# Altium PCB motordriver-v6.3.1.PcbDoc (part 1 of 2)
Units mm, origin at the board's own origin, x right, y up, seen from the top; angles counter-clockwise.
Board outline 43 x 47 mm, 4 copper layers (TOP, GND, POWER, BOT), stack 0.603 mm thick; 165 components, 77 nets, 427 pads, 347 vias.
Unrouted connection lines stored in the file: 27.
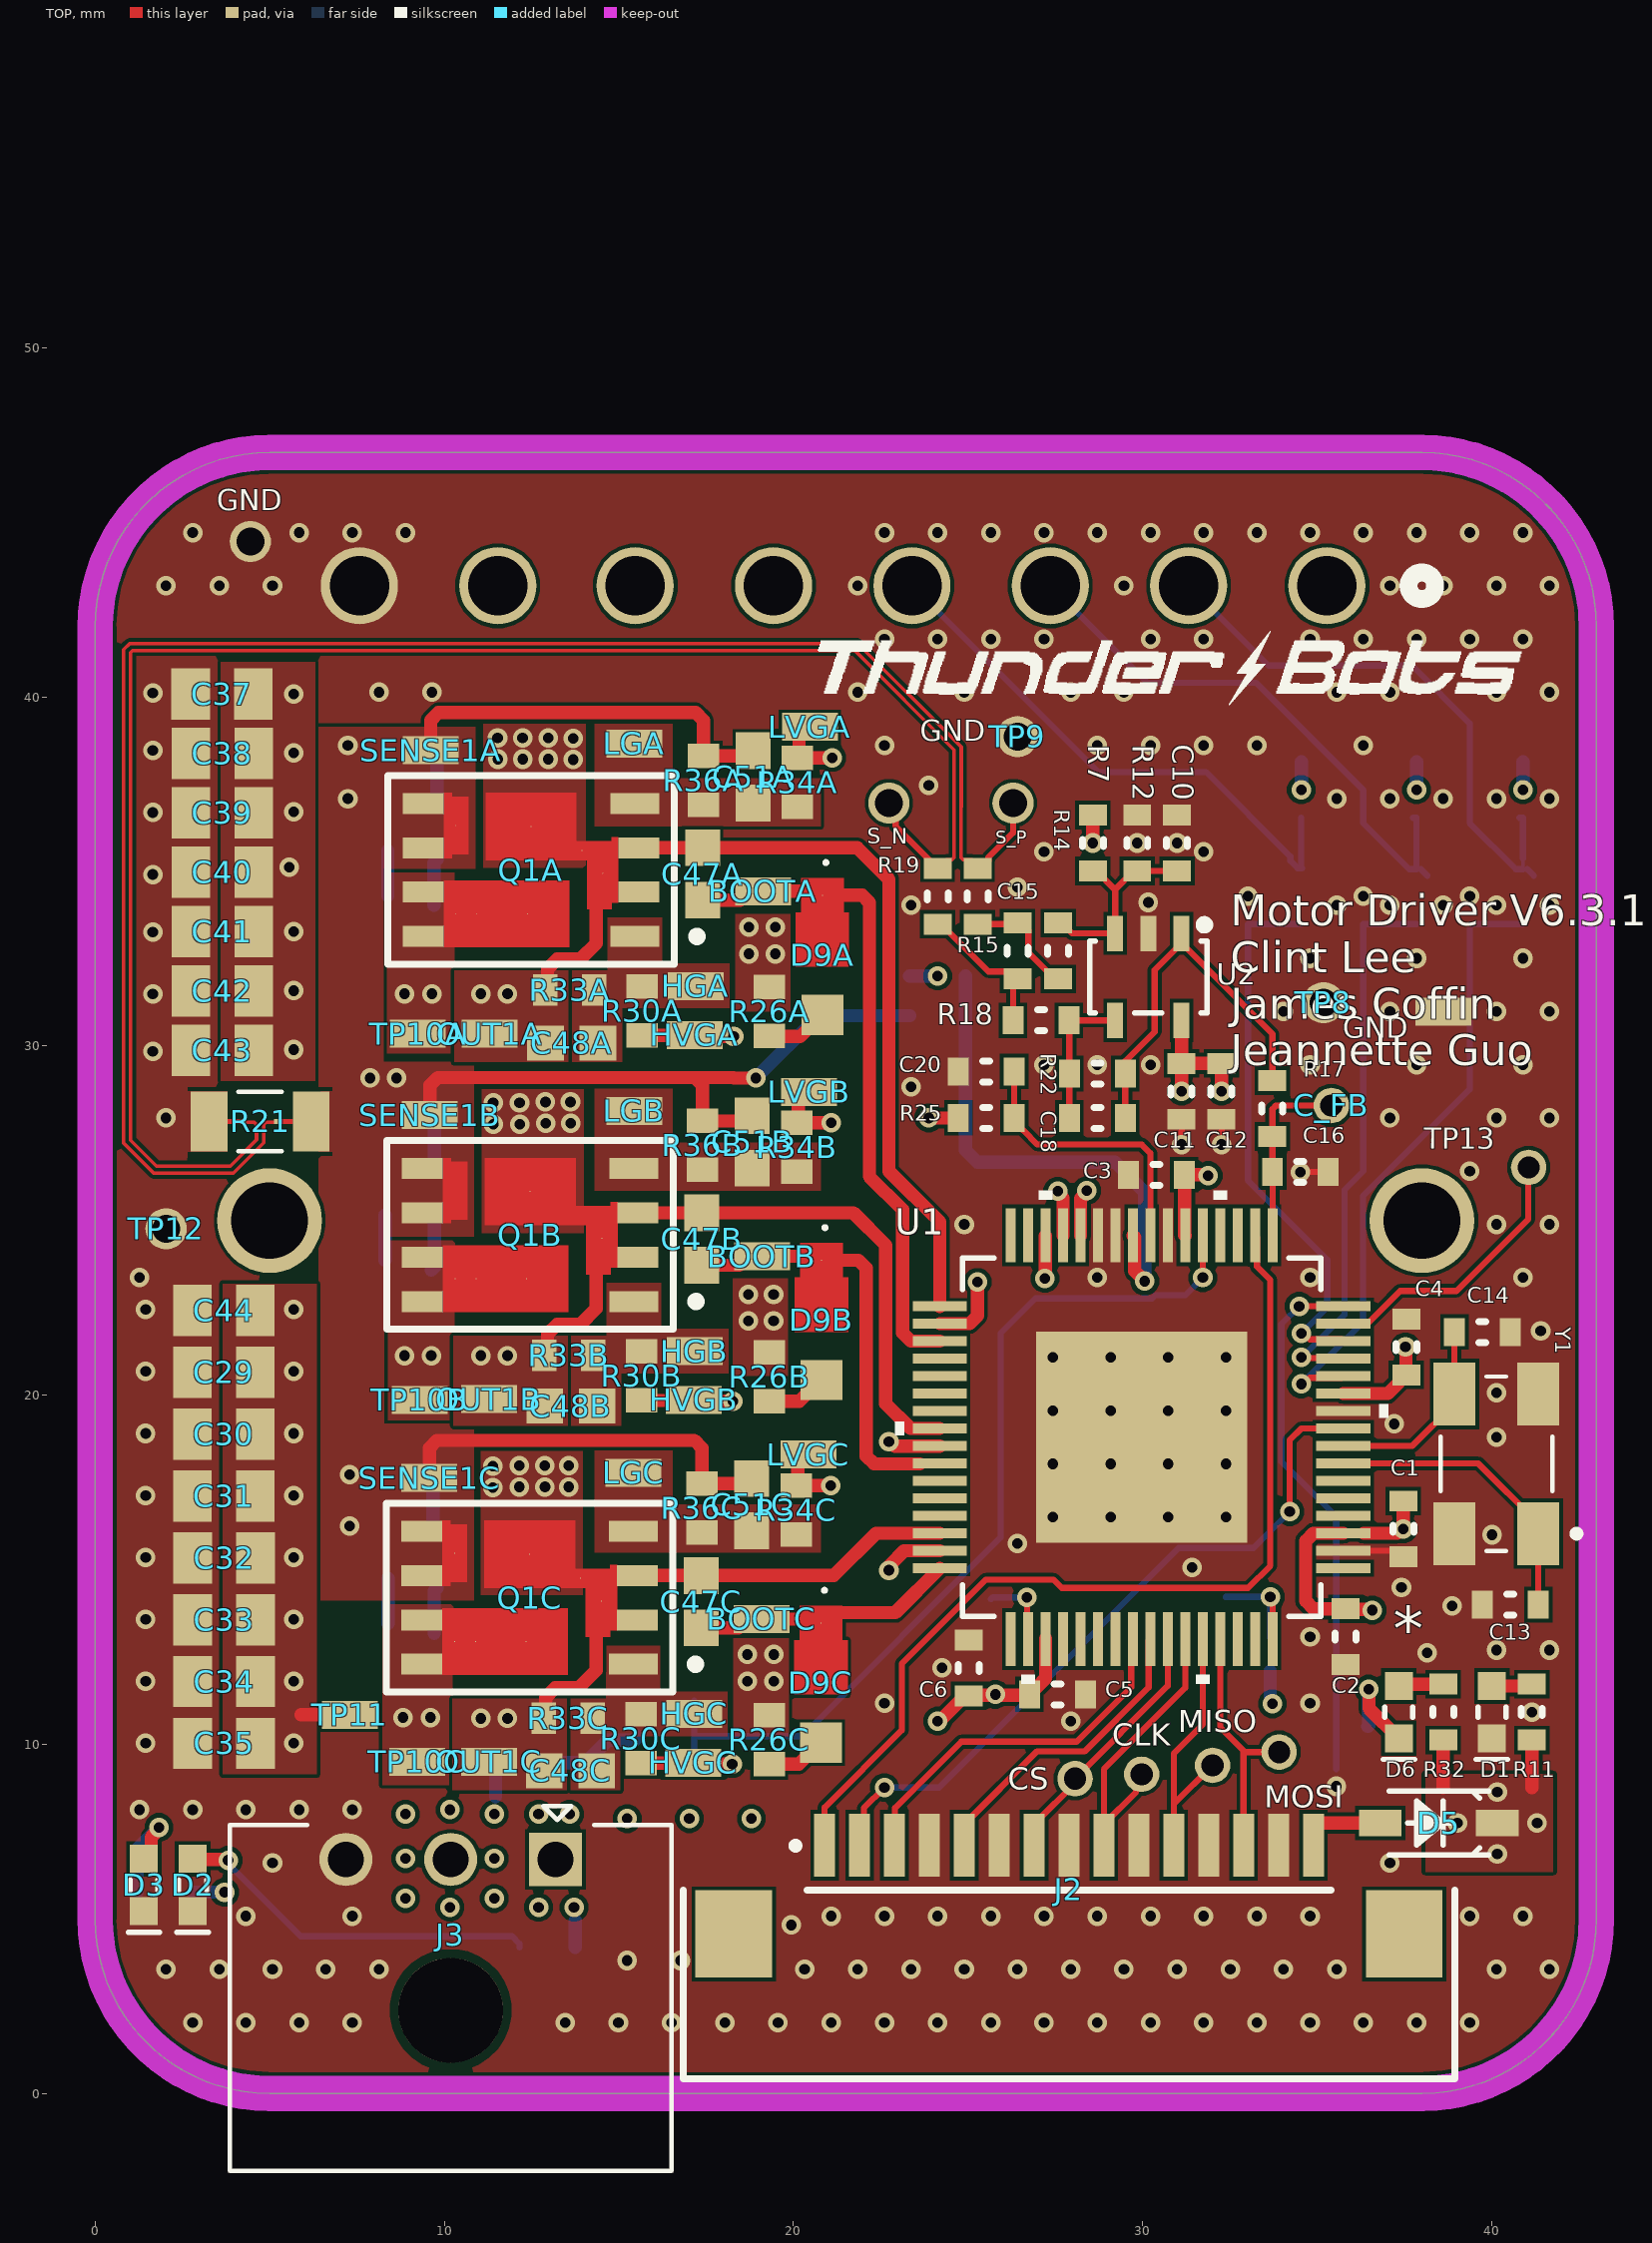
[diagram p0: TOP view]
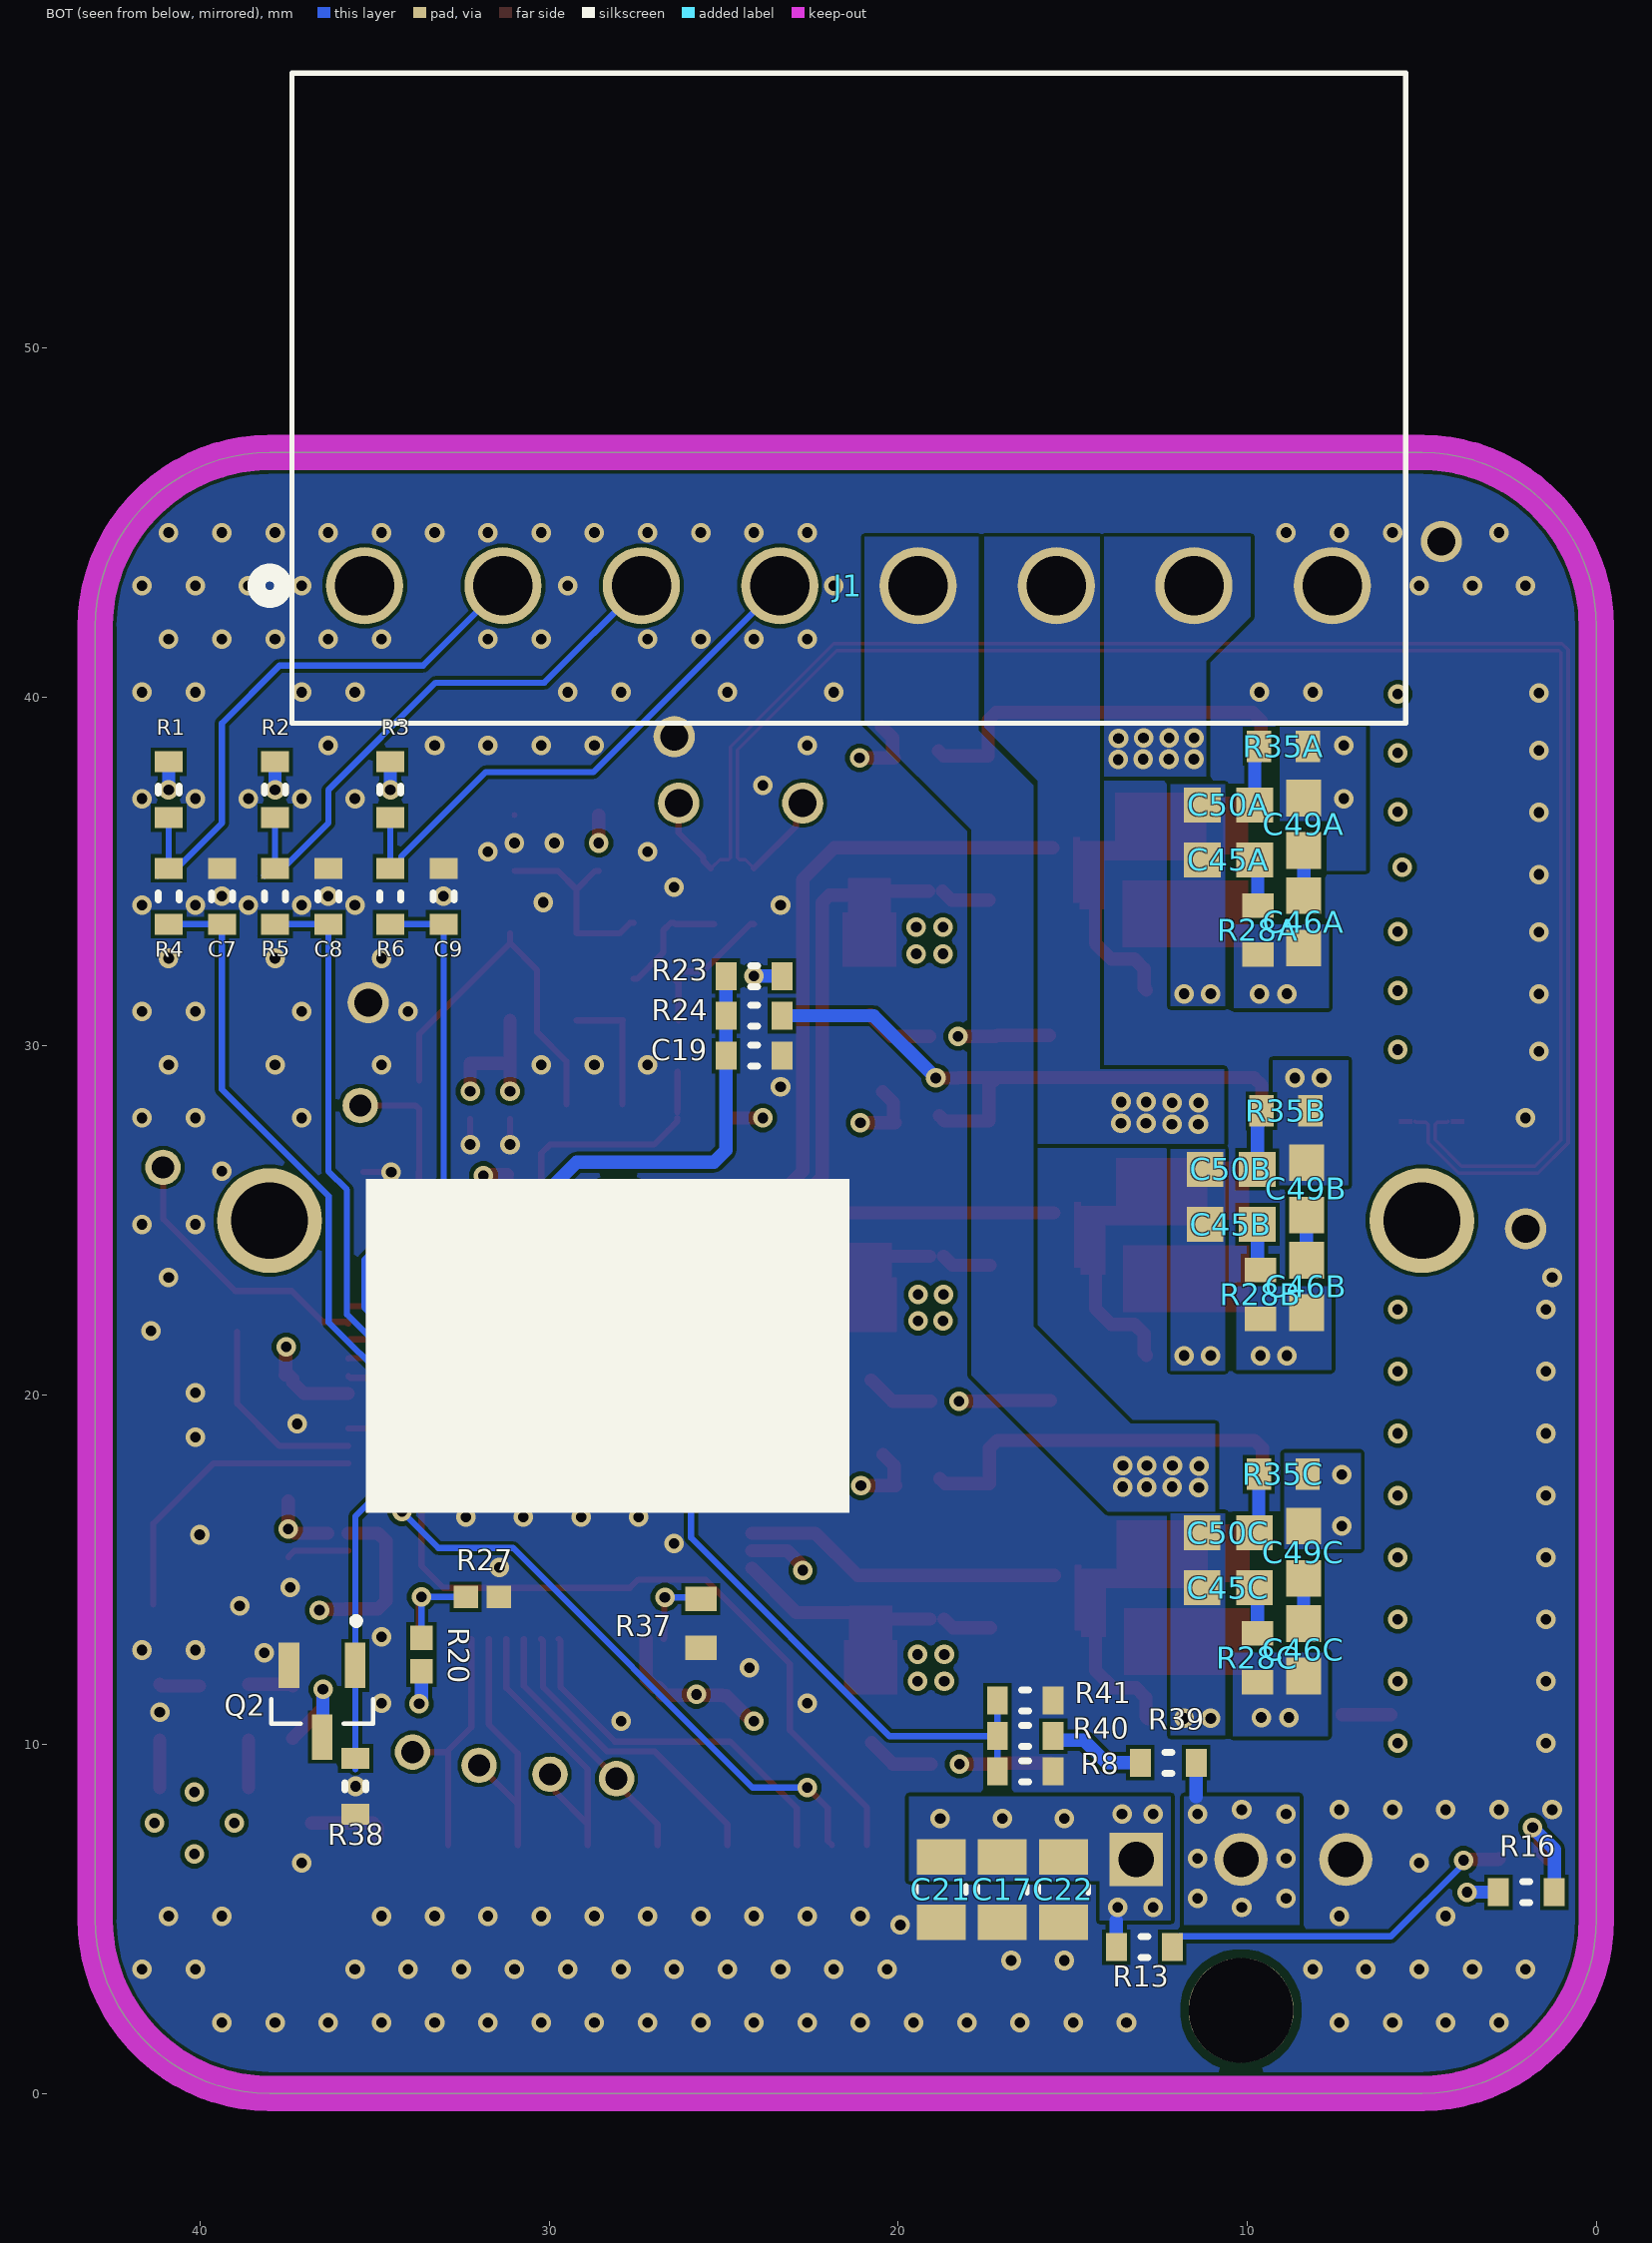
[diagram p1: BOT view, seen from below]
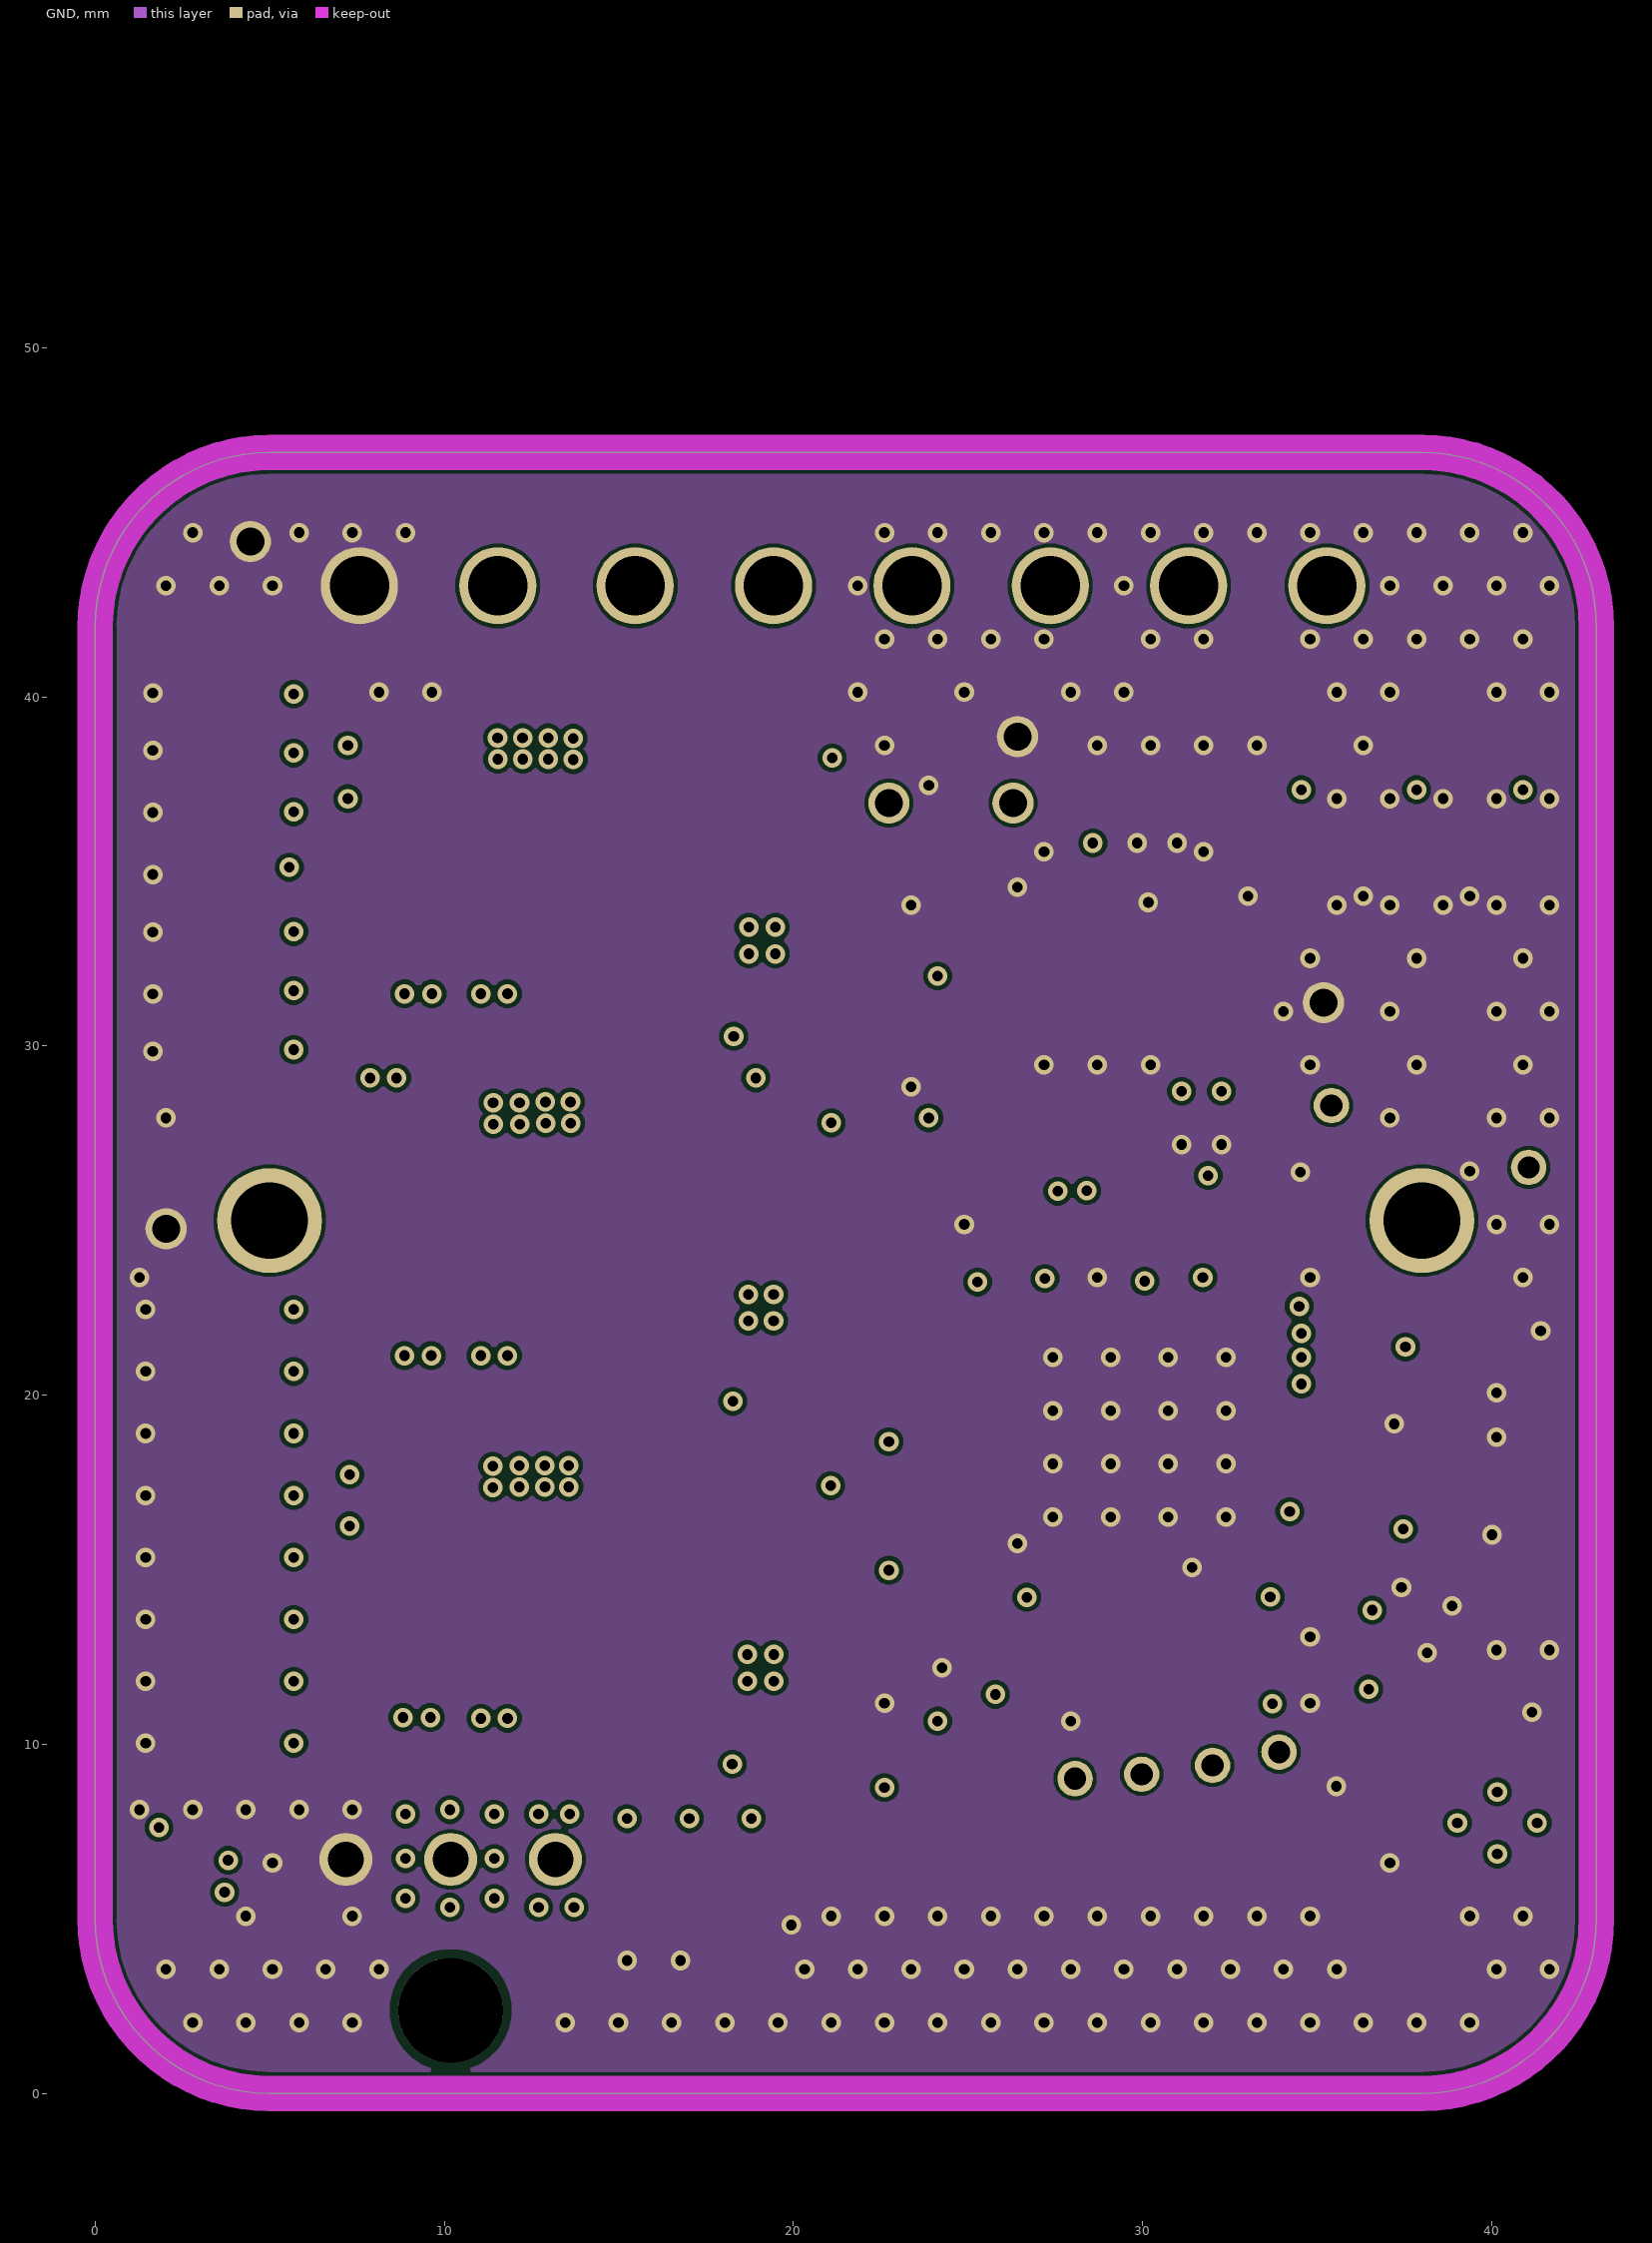
[diagram p2: GND]
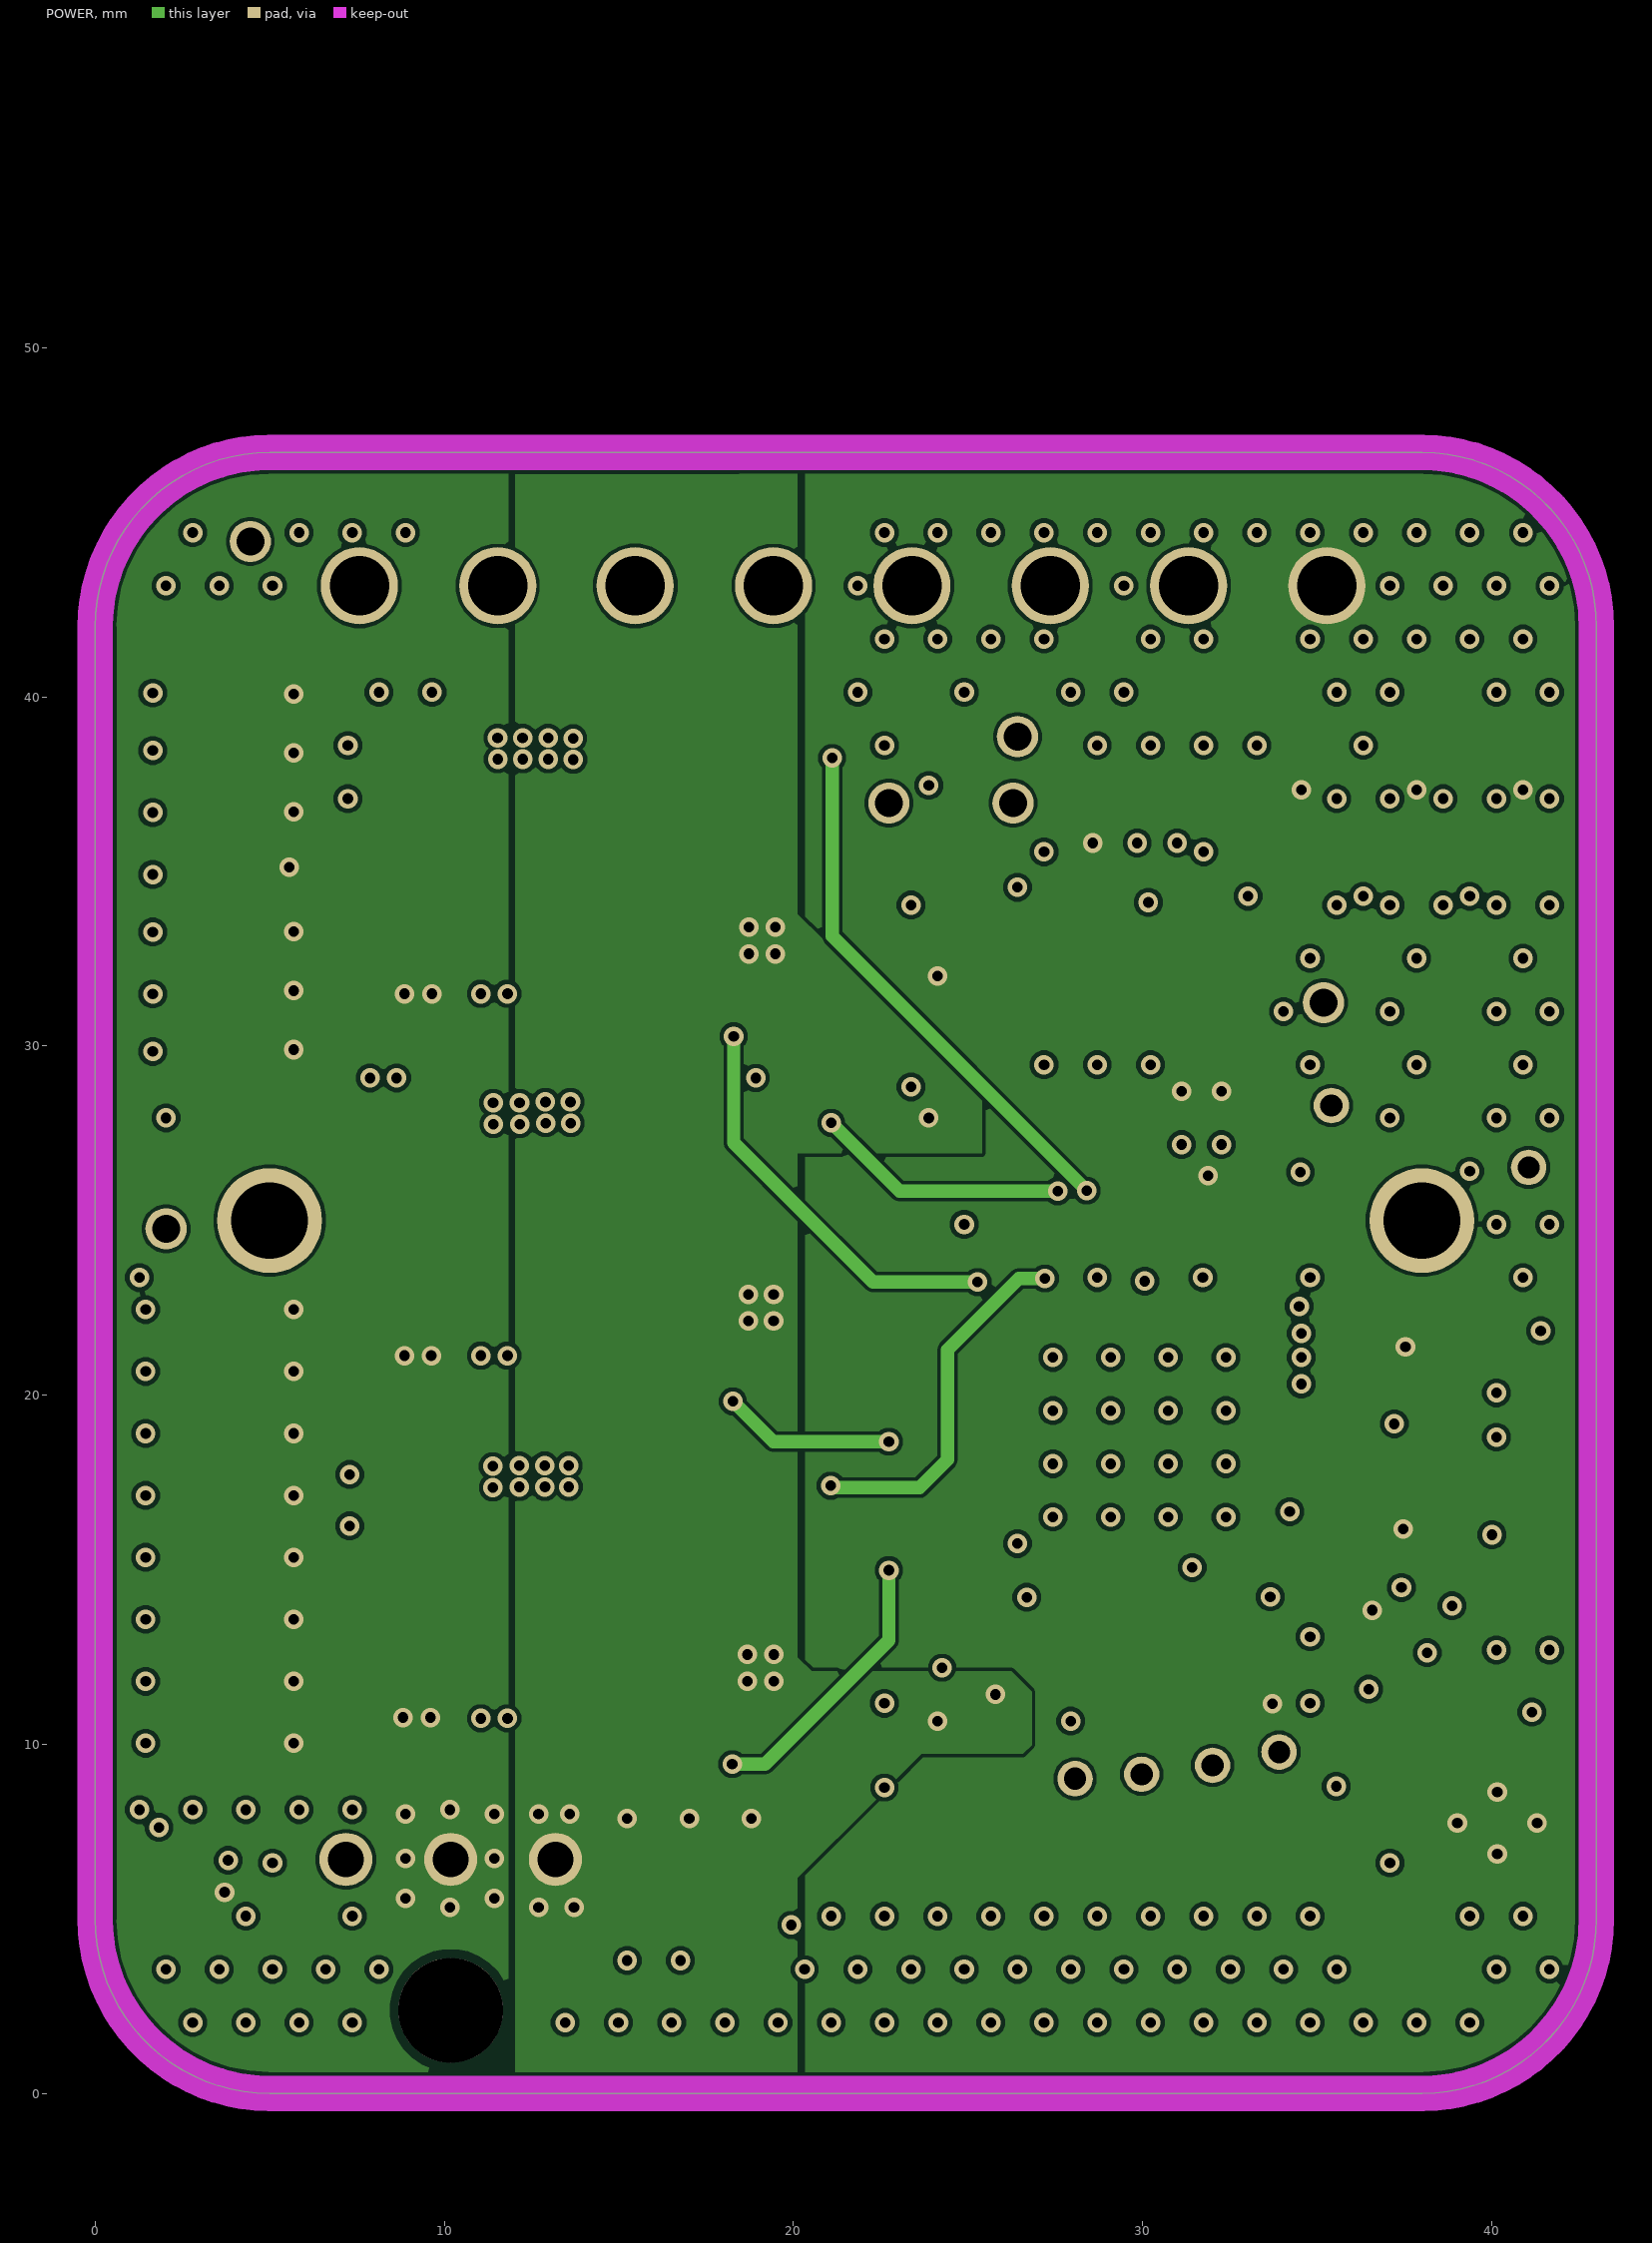
[diagram p3: POWER]
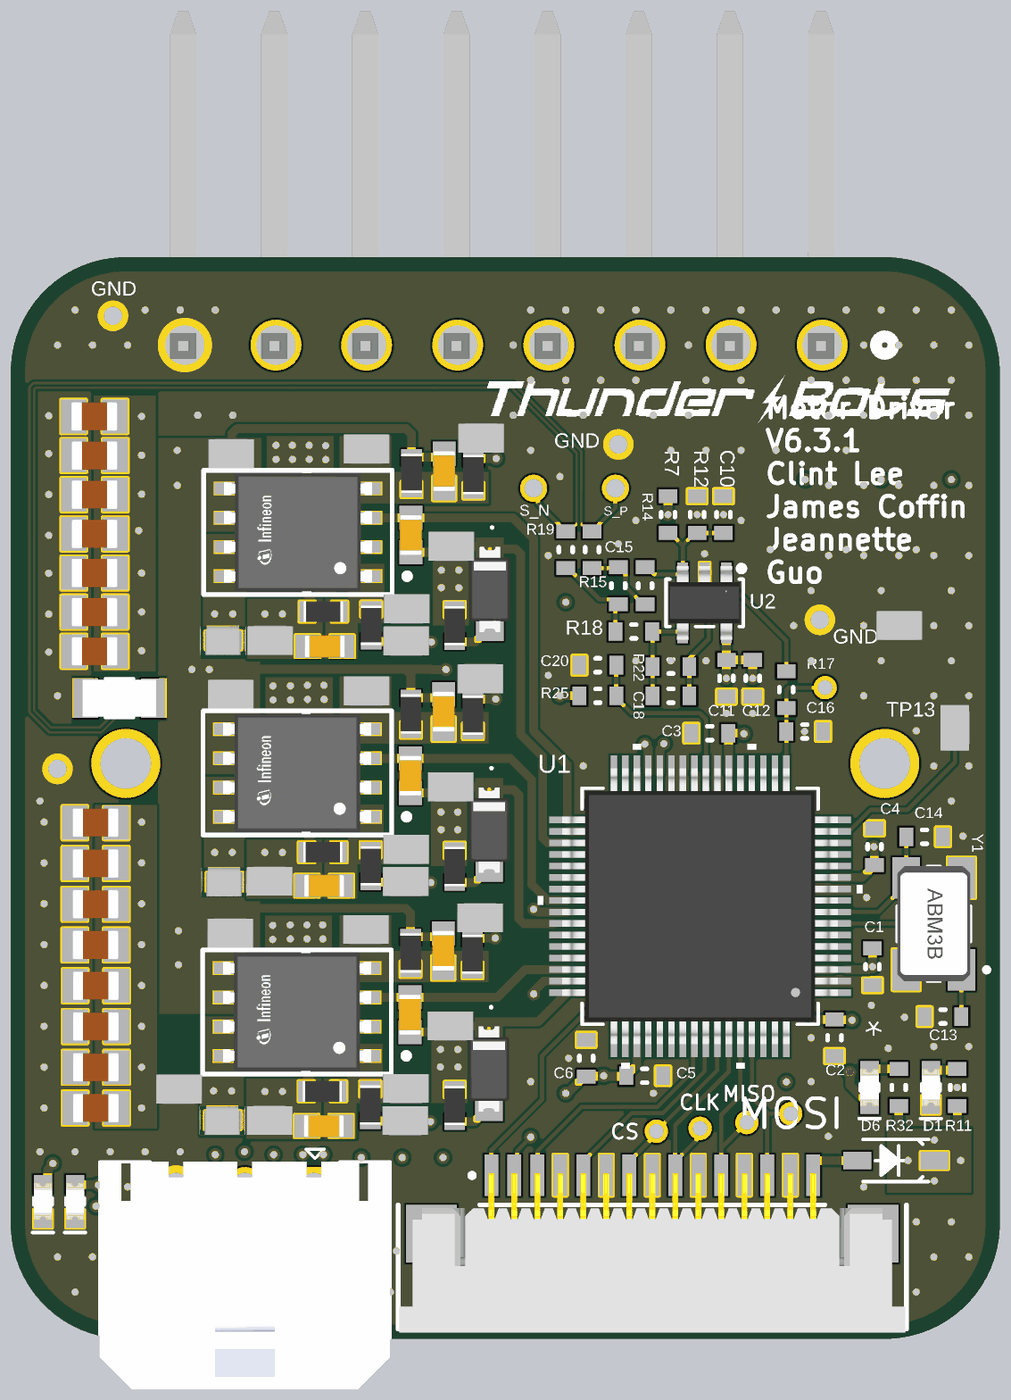
[diagram p5: 3D render of the assembled board from above, using the file's embedded part models]
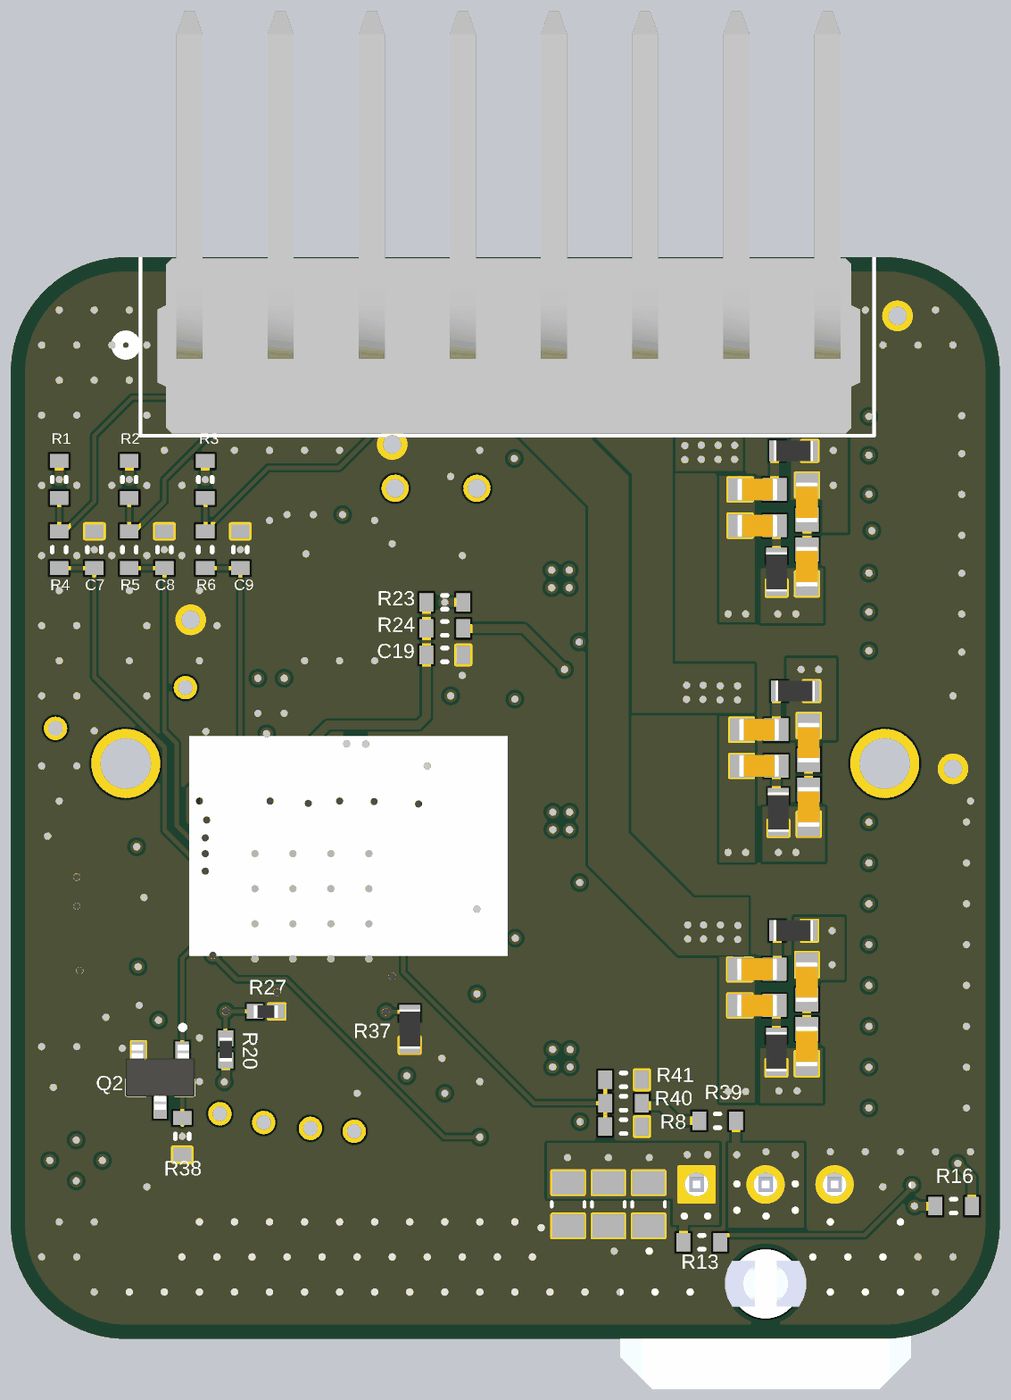
[diagram p6: 3D render of the assembled board from below, using the file's embedded part models]

## Layer stack, top to bottom
Top Solder: solder mask 0.0102, Solder Resist, Dk 3.5
TOP: signal copper 0.0356
Dielectric 2: prepreg 0.0711, PP-006, Dk 4.1
GND: signal copper 0.035
Dielectric 1: dielectric 0.32, FR-4, Dk 4.8
POWER: signal copper 0.035
Dielectric 3: prepreg 0.0711, PP-006, Dk 4.1
BOT: signal copper 0.0356
Bottom Solder: solder mask 0.0102, Solder Resist, Dk 3.5

## Board outline
5,0 cw(c5,5) 0,5 0,42 cw(c5,42) 5,47 38,47 cw(c38,42) 43,42 43,5 cw(c38,5) 38,0

## Design rules (kind name [scope] priority, off if disabled: settings)
BoardOutlineClearance [All] p1: gap=0.2 ignorepadtopadclearanceinfootprint=FALSE
Clearance [All] p1: gap=0.102 ignorepadtopadclearanceinfootprint=FALSE except(0.127: Arc-Via Track-Via SMDPad-Via THPad-Via Via-Via Via-Fill Via-Poly Via-Region Via-Text; 0.25: Arc-Hole Track-Hole SMDPad-Hole THPad-Hole Via-Hole Fill-Hole Poly-Hole Region-Hole Text-Hole)
ComponentClearance [All] p1: gap=0.102 collisioncheckmode=3 verticalgap=0.102 showdistances=TRUE
DiffPairsRouting [All] p1: maxlimit=0.102 minlimit=0.102 mostfreqgap=0.102 toplayer_minwidth=0.102 toplayer_maxwidth=1816.048 toplayer_prefwidth=0.102 midlayer1_minwidth=0.102 midlayer1_maxwidth=1816.048 midlayer1_prefwidth=0.102 midlayer2_minwidth=0.102 midlayer2_maxwidth=1816.048 midlayer2_prefwidth=0.102 bottomlayer_minwidth=0.102 bottomlayer_maxwidth=1816.048 bottomlayer_prefwidth=0.102 maxuncoupledlength=12.7
Height [All] p1: minheight=0 maxheight=1816.048 prefheight=12.7
HoleSize [All] p1: absolutevalues=TRUE maxlimit=6.3 minlimit=0.2 maxpercent=80.000 minpercent=20.000
HoleToHoleClearance [All] p1: gap=0.25 allowstackedmicrovias=FALSE
MinimumAnnularRing [All] p1: minimumring=0.076
MinimumSolderMaskSliver [All] p1: minsoldermaskwidth=0
PlaneClearance [All] p1: clearance=0.102
PlaneConnect PlaneConnectPowerPads [InPadClass('PowerPads')] p1: planeconnectstyle=Direct reliefexpansion=0.508 reliefentries=4 reliefconductorwidth=0.254 reliefairgap=0.254
PlaneConnect [All] p2: pad.planeconnectstyle=Relief pad.reliefexpansion=0.3 pad.reliefentries=4 pad.reliefconductorwidth=0.102 pad.reliefairgap=0.102 via.planeconnectstyle=Direct via.reliefexpansion=0.3 via.reliefentries=4 via.reliefconductorwidth=0.127 via.reliefairgap=0.127
PolygonConnect [All] p1: connectstyle=Direct reliefconductorwidth=0.254 reliefentries=4 polygonreliefangle="90 Angle" airgapwidth=0.254
RoutingVias [All] p1: holewidth=0.2 width=0.45 viastyle="Through Hole" minholewidth=0.2 minwidth=0.45 maxholewidth=6.3 maxwidth=6.55
SilkToSilkClearance [All] p1: silktosilkclearance=0
SilkToSolderMaskClearance [IsPad] p1: minsilkscreentomaskgap=0.102 clearancetoexposedcopper=TRUE
SolderMaskExpansion [All] p1: expansion=0.075 istentingtop=FALSE
SupplyNets "Schematic Supply Nets_4" [InNet('Vdd')] p1: voltage=0.000
SupplyNets "Schematic Supply Nets_3" [InNet('VDD_UI')] p2: voltage=0.000
SupplyNets "Schematic Supply Nets_2" [InNet('GND')] p3: voltage=0.000
SupplyNets "Schematic Supply Nets_1" [InNet('VCC')] p4: voltage=0.000
SupplyNets "Schematic Supply Nets" [InNet('HV')] p5: voltage=0.000
Width [All] p1: maxlimit=1816.048 minlimit=0.102 preferedwidth=0.102
20 further rules are at their usual default settings.

## Classes and differential pairs
channel class inverter: Inverter1 Inverter2 Inverter3
component class STSPIN: C1 C2 C3 C4 C5 C6 C7 C8 C9 C10 C11 C12 C13 C14 C15 C16 C18 C19 C20 C29 C30 C31 C32 C33 C34 C35 C37 C38 C39 C40 C41 C42 C43 C44 C_FB D1 D2 D3 D6 GND Q2 R1 R2 R3 R4 R5 R6 R7 R8 R11 R12 R13 R14 R15 R16 R17 R18 R19 R20 R21 R22 R23 R24 R25 R27 R32 R37 R38 R39 R40 R41 S_N S_P TP8 TP9 TP11 TP12 TP13 U1 U2 Y1
component class "Power, Hall Sensor, Motor Connectors": C17 C21 C22 CLK CS D5 J1 J2 J3 MISO MOSI TP?
component class Inverter3: BOOTC C45C C46C C47C C48C C49C C50C C51C D9C HGC HVGC LGC LVGC OUT1C Q1C R26C R28C R30C R33C R34C R35C R36C SENSE1C TP10C
component class Inverter2: BOOTB C45B C46B C47B C48B C49B C50B C51B D9B HGB HVGB LGB LVGB OUT1B Q1B R26B R28B R30B R33B R34B R35B R36B SENSE1B TP10B
component class Inverter1: BOOTA C45A C46A C47A C48A C49A C50A C51A D9A HGA HVGA LGA LVGA OUT1A Q1A R26A R28A R30A R33A R34A R35A R36A SENSE1A TP10A
differential pair SENSE: +SENSE_P -SENSE_N
differential pair SENSE_F: +SENSE_F_P -SENSE_F_N

## Components (designator, comment, footprint, x,y, rotation, side; value= is the part's Value field where it differs from the comment)
BOOTA "RCT-0C" RCT-0C-Footprint-1#1 19.126,34.431 r90 top (schematic designator BOOT)
BOOTB "RCT-0C" RCT-0C-Footprint-1#1 19.101,23.978 r90 top (schematic designator BOOT)
BOOTC "RCT-0C" RCT-0C-Footprint-1#1 19.086,13.589 r90 top (schematic designator BOOT)
C1 "100nF" 0603 37.465,16.167 r90 top
C2 "100nF" 0603 35.814,13.081 r90 top
C3 "100nF" 0603 30.391,26.314 r0 top
C4 "100nF" 0603 37.553,21.382 r270 top
C5 "100nF" 0603 27.559,11.43 r180 top
C6 "2200pF" 0603 25.019,12.192 r270 top
C7 "50pF 50V" 0603 39.37,34.29 r270 bottom value=10nF
C8 "50pF 50V" 0603 36.322,34.29 r270 bottom value=10nF
C9 "50pF 50V" 0603 33.02,34.29 r270 bottom value=10nF
C10 "22pF" 0603 30.988,35.814 r90 top
C11 "10uF" 0603 31.115,28.702 r90 top
C12 "0.10uF" 0603 32.258,28.702 r90 top
C13 "10pF" 0603 40.532,14.002 r0 top
C14 "10pF" 0603 39.732,21.812 r180 top
C15 "330pF" 0603 26.416,32.724 r90 top
C16 "220pF" 0603 34.519,26.391 r180 top
C17 "CAP 10uF 50V" 0805 17.018,5.842 r90 bottom value=10µF
C18 "22pF" 0603 28.702,27.94 r180 top
C19 "1nF 50V" 0603 24.13,29.718 r0 bottom value=10nF
C20 "0.047uF" 0603 25.521,29.269 r0 top
C21 "CAP 10uF 50V" 0805 18.768,5.842 r90 bottom value=10µF
C22 "CAP 10uF 50V" 0805 15.268,5.842 r90 bottom value=10µF
C29 "GRM21BR61H106KE43K" CAPC2012X145N 3.686,20.657 r0 top value=10µF
C30 "GRM21BR61H106KE43K" CAPC2012X145N 3.686,18.885 r0 top value=10µF
C31 "GRM21BR61H106KE43K" CAPC2012X145N 3.686,17.114 r0 top value=10µF
C32 "GRM21BR61H106KE43K" CAPC2012X145N 3.697,15.342 r0 top value=10µF
C33 "GRM21BR61H106KE43K" CAPC2012X145N 3.697,13.571 r0 top value=10µF
C34 "GRM21BR61H106KE43K" CAPC2012X145N 3.697,11.799 r0 top value=10µF
C35 "GRM21BR61H106KE43K" CAPC2012X145N 3.697,10.028 r0 top value=10µF
C37 "GRM21BR61H106KE43K" CAPC2012X145N 3.632,40.081 r0 top value=10µF
C38 "GRM21BR61H106KE43K" CAPC2012X145N 3.643,38.38 r0 top value=10µF
C39 "GRM21BR61H106KE43K" CAPC2012X145N 3.643,36.679 r0 top value=10µF
C40 "GRM21BR61H106KE43K" CAPC2012X145N 3.643,34.978 r0 top value=10µF
C41 "GRM21BR61H106KE43K" CAPC2012X145N 3.643,33.277 r0 top value=10µF
C42 "GRM21BR61H106KE43K" CAPC2012X145N 3.643,31.575 r0 top value=10µF
C43 "GRM21BR61H106KE43K" CAPC2012X145N 3.643,29.874 r0 top value=10µF
C44 "GRM21BR61H106KE43K" CAPC2012X145N 3.686,22.428 r0 top value=10µF
C45A "Ceramic Capacitor 0603 Temp" "0603 IPC Class B"#1 10.541,35.331 r180 bottom (schematic designator C45)
C45B "Ceramic Capacitor 0603 Temp" "0603 IPC Class B"#1 10.465,24.892 r180 bottom (schematic designator C45)
C45C "Ceramic Capacitor 0603 Temp" "0603 IPC Class B"#1 10.548,14.484 r180 bottom (schematic designator C45)
C46A "Ceramic Capacitor 0.22uF +/-10% 50V 0603" "0603 IPC Class B"#1 8.382,33.553 r270 bottom value=220nF (schematic designator C46)
C46B "Ceramic Capacitor 0.22uF +/-10% 50V 0603" "0603 IPC Class B"#1 8.306,23.114 r270 bottom value=220nF (schematic designator C46)
C46C "Ceramic Capacitor 0.22uF +/-10% 50V 0603" "0603 IPC Class B"#1 8.389,12.706 r270 bottom value=220nF (schematic designator C46)
C47A "Ceramic Capacitor 0.22uF +/-10% 50V 0603" "0603 IPC Class B"#1 17.399,34.925 r270 top value=220nF (schematic designator C47)
C47B "Ceramic Capacitor 0.22uF +/-10% 50V 0603" "0603 IPC Class B"#1 17.374,24.471 r270 top value=220nF (schematic designator C47)
C47C "Ceramic Capacitor 0.22uF +/-10% 50V 0603" "0603 IPC Class B"#1 17.358,14.083 r270 top value=220nF (schematic designator C47)
C48A "Ceramic Capacitor 0603 Temp" "0603 IPC Class B"#1 13.652,30.088 r0 top (schematic designator C48)
C48B "Ceramic Capacitor 0603 Temp" "0603 IPC Class B"#1 13.626,19.685 r0 top (schematic designator C48)
C48C "Ceramic Capacitor 0603 Temp" "0603 IPC Class B"#1 13.611,9.246 r0 top (schematic designator C48)
C49A "Ceramic Capacitor 0.22uF +/-10% 50V 0603" "0603 IPC Class B"#1 8.382,36.347 r270 bottom value=220nF (schematic designator C49)
C49B "Ceramic Capacitor 0.22uF +/-10% 50V 0603" "0603 IPC Class B"#1 8.306,25.908 r270 bottom value=220nF (schematic designator C49)
C49C "Ceramic Capacitor 0.22uF +/-10% 50V 0603" "0603 IPC Class B"#1 8.389,15.5 r270 bottom value=220nF (schematic designator C49)
C50A "Ceramic Capacitor 0603 Temp" "0603 IPC Class B"#1 10.541,36.906 r0 bottom (schematic designator C50)
C50B "Ceramic Capacitor 0603 Temp" "0603 IPC Class B"#1 10.465,26.467 r0 bottom (schematic designator C50)
C50C "Ceramic Capacitor 0603 Temp" "0603 IPC Class B"#1 10.548,16.059 r0 bottom (schematic designator C50)
C51A "Ceramic Capacitor 0603 Temp" "0603 IPC Class B"#1 18.847,37.706 r270 top (schematic designator C51)
C51B "Ceramic Capacitor 0603 Temp" "0603 IPC Class B"#1 18.821,27.252 r270 top (schematic designator C51)
C51C "Ceramic Capacitor 0603 Temp" "0603 IPC Class B"#1 18.806,16.863 r270 top (schematic designator C51)
C_FB "Test Point (Via)" TP#1 35.408,28.296 r90 top
CLK "Test Point (Via)" TP#1 29.972,9.144 r0 top
CS "Test Point (Via)" TP#1 28.067,9.017 r0 top
D1 "0603 2V" "0603 - LED" 40.005,10.922 r270 top
D2 "0603 2V" "0603 - LED" 2.794,5.969 r270 top
D3 "0603 3.2V" "0603 - LED" 1.397,5.969 r270 top
D5 "SM5817PL-TP" SOD-123 38.481,7.747 r180 top
D6 "0603 2V" "0603 - LED" 37.338,10.922 r270 top
D9A "PMEG4010EXEX" PMEG4010EXEX 20.828,32.602 r270 top (schematic designator D9)
D9B "PMEG4010EXEX" PMEG4010EXEX 20.803,22.149 r270 top (schematic designator D9)
D9C "PMEG4010EXEX" PMEG4010EXEX 20.787,11.76 r270 top (schematic designator D9)
GND "Test Point (Via)" TP#2 4.445,44.45 r180 top (schematic designator TP2)
GND "RCT-0C" RCT-0C-Footprint-1#1 38.608,30.988 r90 top (schematic designator TP1)
HGA "RCT-0C" RCT-0C-Footprint-1#1 17.196,31.713 r90 top (schematic designator HG)
HGB "RCT-0C" RCT-0C-Footprint-1#1 17.17,21.26 r90 top (schematic designator HG)
HGC "RCT-0C" RCT-0C-Footprint-1#1 17.155,10.871 r90 top (schematic designator HG)
HVGA "RCT-0C" RCT-0C-Footprint-1#1 17.17,30.316 r90 top (schematic designator HVG)
HVGB "RCT-0C" RCT-0C-Footprint-1#1 17.145,19.863 r90 top (schematic designator HVG)
HVGC "RCT-0C" RCT-0C-Footprint-1#1 17.13,9.474 r90 top (schematic designator HVG)
J1 "26481082" CONN_A-41662-B08A_MOL 35.281,43.18 r0 bottom locked
J2 "ZF1-15-01-X-WT-XX" SAMTEC_ZF1-15-01-X-WT-XX 27.892,7.112 r0 top
J3 "436500302" MOLEX_436500302 13.183,6.706 r0 top
LGA "RCT-0C" RCT-0C-Footprint-1#1 15.443,38.659 r90 top (schematic designator LG)
LGB "RCT-0C" RCT-0C-Footprint-1#1 15.443,28.143 r90 top (schematic designator LG)
LGC "RCT-0C" RCT-0C-Footprint-1#1 15.418,17.78 r90 top (schematic designator LG)
LVGA "RCT-0C" RCT-0C-Footprint-1#1 20.472,39.141 r270 top (schematic designator LVG)
LVGB "RCT-0C" RCT-0C-Footprint-1#1 20.447,28.688 r270 top (schematic designator LVG)
LVGC "RCT-0C" RCT-0C-Footprint-1#1 20.432,18.299 r270 top (schematic designator LVG)
MISO "Test Point (Via)" TP#1 32.004,9.398 r0 top
MOSI "Test Point (Via)" TP#1 33.909,9.779 r0 top
OUT1A "RCT-0C" RCT-0C-Footprint-1#1 11.303,30.353 r270 top (schematic designator OUT1)
OUT1B "RCT-0C" RCT-0C-Footprint-1#1 11.278,19.888 r270 top (schematic designator OUT1)
OUT1C "RCT-0C" RCT-0C-Footprint-1#1 11.278,9.5 r270 top (schematic designator OUT1)
Q1A "IAUC45N04S6N070H" IFX-PG-TDSON-8-57-V 12.484,35.042 r180 top (schematic designator Q1)
Q1B "IAUC45N04S6N070H" IFX-PG-TDSON-8-57-V 12.459,24.588 r180 top (schematic designator Q1)
Q1C "IAUC45N04S6N070H" IFX-PG-TDSON-8-57-V 12.444,14.199 r180 top (schematic designator Q1)
Q2 "TN2130K1-G" SOT95P237X112-3N 36.5,11.236 r270 bottom
R1 "RES 10k 1/8W - 1%" 0603 40.894,37.338 r270 bottom value=10k
R2 "RES 10k 1/8W - 1%" 0603 37.846,37.338 r270 bottom value=10k
R3 "RES 10k 1/8W - 1%" 0603 34.544,37.338 r270 bottom value=10k
R4 "1.8k" 0603 40.894,34.29 r270 bottom
R5 "1.8k" 0603 37.846,34.29 r270 bottom
R6 "1.8k" 0603 34.544,34.29 r270 bottom
R7 "5.83k" 0603 28.575,35.814 r270 top value=8.45k
R8 "RES 27k 1/8W" 0603 16.358,9.22 r180 bottom value=27k
R11 "110" 0603 41.148,10.922 r270 top
R12 "5.83k" 0603 29.845,35.814 r270 top value=8.45k
R13 "845R" 0603 12.954,4.191 r0 bottom value=8.45k
R14 "0R" 0603 27.581,32.724 r90 top value=8.45k
R15 "1.5k" 0603 25.273,34.29 r270 top value=8.45k
R16 "1.87K" 0603 2.007,5.766 r0 bottom value=8.45k
R17 "100R" 0603 33.716,28.209 r270 top value=8.45k
R18 "0R" 0603 27.089,30.734 r0 top value=8.45k
R19 "1.5k" 0603 24.13,34.29 r270 top value=8.45k
R20 "Resistor 0R 0402 63 mW" RESC1005X40X25ML05T10 33.655,12.573 r270 bottom value=0
R21 "RES 15m 1W" "1206 - CURRENT SENSE" 4.724,27.838 r180 top
R22 "3k" 0603 28.702,29.21 r0 top value=8.45k
R23 "17.2k" 0603 24.13,32.004 r0 bottom value=8.45k
R24 "2k" 0603 24.13,30.867 r0 bottom
R25 "47k" 0603 25.527,27.94 r180 top
R26A "Resistor 10R +/-1% 250mW 0603" "0603 IPC Class B"#2 19.304,30.988 r90 top value=10 (schematic designator R26)
R26B "Resistor 10R +/-1% 250mW 0603" "0603 IPC Class B"#2 19.304,20.523 r90 top value=10 (schematic designator R26)
R26C "Resistor 10R +/-1% 250mW 0603" "0603 IPC Class B"#2 19.304,10.135 r90 top value=10 (schematic designator R26)
R27 "Resistor 0R 0402 63 mW" RESC1005X40X25ML05T10 31.91,14.224 r180 bottom value=0
R28A "Resistor 0603 Temp" "0603 IPC Class B"#2 9.703,33.325 r270 bottom (schematic designator R28)
R28B "Resistor 0603 Temp" "0603 IPC Class B"#2 9.627,22.885 r270 bottom (schematic designator R28)
R28C "Resistor 0603 Temp" "0603 IPC Class B"#2 9.71,12.478 r270 bottom (schematic designator R28)
R30A "Resistor 10R +/-1% 250mW 0603" "0603 IPC Class B"#2 15.672,31.002 r90 top value=10 (schematic designator R30)
R30B "Resistor 10R +/-1% 250mW 0603" "0603 IPC Class B"#2 15.646,20.549 r90 top value=10 (schematic designator R30)
R30C "Resistor 10R +/-1% 250mW 0603" "0603 IPC Class B"#2 15.631,10.16 r90 top value=10 (schematic designator R30)
R32 "110" 0603 38.608,10.922 r270 top
R33A "Resistor 100k +/-1% 1/10W 0603" "0603 IPC Class B"#2 13.589,31.598 r0 top value=100k (schematic designator R33)
R33B "Resistor 100k +/-1% 1/10W 0603" "0603 IPC Class B"#2 13.564,21.144 r0 top value=100k (schematic designator R33)
R33C "Resistor 100k +/-1% 1/10W 0603" "0603 IPC Class B"#2 13.548,10.755 r0 top value=100k (schematic designator R33)
R34A "Resistor 10R +/-1% 250mW 0603" "0603 IPC Class B"#2 20.117,37.552 r270 top value=10 (schematic designator R34)
R34B "Resistor 10R +/-1% 250mW 0603" "0603 IPC Class B"#2 20.091,27.099 r270 top value=10 (schematic designator R34)
R34C "Resistor 10R +/-1% 250mW 0603" "0603 IPC Class B"#2 20.076,16.71 r270 top value=10 (schematic designator R34)
R35A "Resistor 0603 Temp" "0603 IPC Class B"#2 8.966,38.583 r0 bottom (schematic designator R35)
R35B "Resistor 0603 Temp" "0603 IPC Class B"#2 8.89,28.143 r0 bottom (schematic designator R35)
R35C "Resistor 0603 Temp" "0603 IPC Class B"#2 8.974,17.736 r0 bottom (schematic designator R35)
R36A "Resistor 100k +/-1% 1/10W 0603" "0603 IPC Class B"#2 17.424,37.606 r270 top value=100k (schematic designator R36)
R36B "Resistor 100k +/-1% 1/10W 0603" "0603 IPC Class B"#2 17.399,27.153 r270 top value=100k (schematic designator R36)
R36C "Resistor 100k +/-1% 1/10W 0603" "0603 IPC Class B"#2 17.384,16.764 r270 top value=100k (schematic designator R36)
R37 "Resistor 0R 0.1W 0603" "0603 IPC Class B"#2 25.654,13.462 r270 bottom value=0
R38 "10k" 0603 35.544,8.798 r90 bottom
R39 "470k" 0603 12.268,9.474 r0 bottom
R40 "470k" 0603 16.358,10.236 r0 bottom
R41 "68k" 0603 16.358,11.252 r0 bottom
S_N "Test Point (Via)" TP#2 22.733,36.957 r270 top
S_P "Test Point (Via)" TP#2 26.289,36.957 r270 top
SENSE1A "RCT-0C" RCT-0C-Footprint-1#1 9.612,38.471 r270 top (schematic designator SENSE1)
SENSE1B "RCT-0C" RCT-0C-Footprint-1#1 9.587,28.017 r270 top (schematic designator SENSE1)
SENSE1C "RCT-0C" RCT-0C-Footprint-1#1 9.572,17.628 r270 top (schematic designator SENSE1)
TP8 "Test Point (Via)" TP#2 35.179,31.242 r90 top
TP9 "Test Point (Via)" TP#2 26.416,38.862 r90 top
TP10A "RCT-0C" RCT-0C-Footprint-1#1 9.246,30.353 r270 top (schematic designator TP10)
TP10B "RCT-0C" RCT-0C-Footprint-1#1 9.296,19.863 r270 top (schematic designator TP10)
TP10C "RCT-0C" RCT-0C-Footprint-1#1 9.22,9.5 r270 top (schematic designator TP10)
TP11 "RCT-0C" RCT-0C-Footprint-1#1 7.29,10.846 r90 top
TP12 "Test Point (Via)" TP#2 2.032,24.765 r180 top
TP13 "RCT-0C" RCT-0C-Footprint-1#2 41.057,26.524 r180 top
U1 "STSPIN32F0251" TQFP64_10X10_STM-M 29.972,18.796 r180 top
U2 "OPA356" SOT-23-5_MC_MCH-L 31.115,33.223 r270 top
Y1 "ABM3B-8.000MHZ-10-1-U-T" XTAL_ABM3B-8.000MHZ-10-1-U-T 40.132,18.034 r180 top

## Footprints (in the part's own frame and the unit in brackets; to place one, negate y for a bottom-side part, rotate by r counter-clockwise, add the part's x,y. Pads: shape width x height; smd on the part's side, far side on the other; paste and mask are expansions set on the pad)
0603 [mm] "Chip Resistor, 2-Leads, Body 1.60x0.80mm, IPC High Density"
  rect 0.6x0.8 smd mask+0.1: 1(-0.8,0) 2(0.8,0)
  silkscreen extent -0.1,-0.3 0.1,0.3, body extent -0.8,-0.4 0.8,0.4, height 0.6
"0603 - LED" [mm]
  rect 0.8x0.8 smd: 1(-0.75,0) 2(0.75,0)
  silkscreen extent -0.15,-0.45 1.35,0.45, body extent -0.8,-0.4 0.8,0.4, height 0.65
"0603 IPC Class B"#1 [mm] "Chip Capacitor, 2-Leads, IPC Medium Density"
  rect 1.05x1 smd: 1(-0.75,0) 2(0.75,0)
  body extent -0.87,-0.48 0.87,0.48, height 0.94
"0603 IPC Class B"#2 [mm]
  rect 0.7x0.9 smd: 1(-0.7,0) 2(0.7,0)
  body extent -0.85,-0.45 0.85,0.45, height 0.55
0805 [mil]
  rect 40x55 smd: 1(-37,0) 2(37,0)
  silkscreen extent -4,-28 4,28, body extent -47,-28 47,28, height 24
"1206 - CURRENT SENSE" [mm]
  rect 1.05x1.72 smd: 1(-1.46,0) 2(1.46,0)
  rect 0.152x0.152 smd mask+0.102: S1(-0.476,0) S2(0.476,0)
  TOP region: -0.935,-0.076 -0.552,-0.076 -0.552,0.076 -0.935,0.076
  TOP region: 0.935,0.076 0.552,0.076 0.552,-0.076 0.935,-0.076
  silkscreen extent -0.62,-0.85 0.62,0.85, body extent -1.6,-0.8 1.6,0.8, height 1.61
CAPC2012X145N [mm]
  rect 1.11x1.47 smd: 1(-0.9,0) 2(0.9,0)
  body extent -1,-0.63 1,0.63, height 1.45
CONN_A-41662-B08A_MOL [mil]
  round 87 hole 67: 1(0,0) 2(-156,0) 3(-312,0) 4(-468,0) 5(-624,0) 6(-780,0) 7(-935,0) 8(-1091,0)
  silkscreen extent -1174,-578 122,155, body extent -1150,-572 53,152, height 346
IFX-PG-TDSON-8-57-V [mm] "TDSON 8, 1.27mm pitch; 8 pin, 5.48 mm L X 5.15 mm W X 1 mm H body"
  rect 1.4x0.6 smd paste-0.3 mask+0: 1(-2.97,1.905) 4(-2.97,-1.905)
  rect 1.17x0.6 smd paste-0.3 mask+0: 2(-3.085,0.635) 3(-3.085,-0.635) 5(3.085,-1.905) 6(3.085,-0.635) 7(3.085,0.635) 8(3.085,1.905)
  round 0.025 smd: 2,3(-2.055,0.095) 2,3(-1.46,-0.555) 2,3(0,-1.245) 5,6(2.15,-1.27) 7,8(0.105,1.252) 7,8(1.55,1.252) 7,8(2.15,1.252)
  TOP region: 2.5,-2.205 2.27,-2.205 2.27,-2.095 1.8,-2.095 1.8,-0.445 2.27,-0.445 2.27,-0.335 2.5,-0.335
  TOP region: -1.09,2.205 -1.09,0.3 1.3,0.3 1.3,2.205
  TOP region: 1.3,2.205 1.3,0.3 1.8,0.3 1.8,2.205
  TOP region: 1.8,2.205 1.8,0.3 2.5,0.3 2.5,2.205
  TOP region: -1.651,-0.825 -1.27,-0.825 -1.27,-0.285 -1.651,-0.285
  TOP region: -2.5,-0.935 -2.31,-0.935 -2.31,-0.825 -1.61,-0.825 -1.61,1.125 -2.31,1.125 -2.31,0.935 -2.5,0.935
  TOP region: -1.3,-2.205 -1.3,-0.285 1.3,-0.285 1.3,-2.205
  silkscreen extent -4.87,-2.7 4.1,2.7, body extent -3.22,-2.7 3.22,2.71, height 1.01
MOLEX_436500302 [mm]
  rect 1.52x1.52 / inner round 1.52 / far side rect 1.52x1.52 hole 1.02 mask+0.076: 1(0,0)
  round 1.52 hole 1.02 mask+0.076: 2(-3,0) 3(-6,0)
  round 3 hole 3 unplated mask+0.076: 4(-3,-4.32)
  silkscreen extent -9.33,-8.92 3.32,1.53, body extent -9.33,-8.9 3.32,1, height 5.57
PMEG4010EXEX [mm]
  round 0.025 smd: 1(-1.713,0)
  rect 1.15x1.2 smd: 2(1.713,0)
  TOP region: -2.21,-0.61 -2.21,0.61 -1.219,0.61 -1.219,0.762 0.33,0.762 0.33,-0.762 -1.219,-0.762 -1.219,-0.61
  silkscreen extent -2.7,0.05 -2.6,0.15, body extent -1.81,-0.89 1.89,0.89, height 0.9
RCT-0C-Footprint-1#1 [mm]
  rect 0.8x1.6 smd: 1(0,0)
  body extent -0.64,-1.03 0.64,0.97, height 1.46
RCT-0C-Footprint-1#2 [mm]
  round 1.016 hole 0.635: 1(0,0)
  body extent -0.64,-1.03 0.64,0.97, height 1.46
RESC1005X40X25ML05T10 [mm] "Chip Resistor, 2-Leads, Body 1.05x0.55mm, IPC Low Density"
  rect 0.7x0.65 smd: 1(-0.475,0) 2(0.475,0)
  body extent -0.53,-0.28 0.53,0.28, height 0.4
SAMTEC_ZF1-15-01-X-WT-XX [mm]
  rect 0.6x1.8 smd: 01(-7,0) 02(-6,0) 03(-5,0) 04(-4,0) 05(-3,0) 06(-2,0) 07(-1,0) 08(0,0) 09(1,0) 10(2,0) 11(3,0) 12(4,0) 13(5,0) 14(6,0) 15(7,0)
  rect 2.2x2.5 smd: S1(-9.6,-2.54) S2(9.6,-2.54)
  silkscreen extent -11.05,-6.69 11.05,0.08, body extent -11.01,-6.83 11.01,0.08, height 3.03
SOD-123 [mil]
  rect 48x30 smd: A(66,0) C(-66,0)
  silkscreen extent -56,-36 56,36
SOT95P237X112-3N [mm]
  rect 1.3x0.59 smd: 1(-1.025,0.95) 2(-1.025,-0.95) 3(1.025,0)
  silkscreen extent -2.39,-1.46 0.65,1.46, body extent -1.54,-1.5 1.29,1.5, height 1.2
SOT-23-5_MC_MCH-L [mil]
  rect 40x18 smd: 1(0,0) 2(0,-37.4) 3(0,-74.8) 4(98,-74.8) 5(98,0)
  silkscreen extent -15,-103 90,31, body extent -14,-98 112,24, height 57
TP#1 [mil] "Test point (40mil Standard)"
  round 40 hole 25: 1(0,0)
TP#2 [mil] "Test point (40mil Standard)"
  round 46.5 hole 31.5: 1(0,0)
TQFP64_10X10_STM-M [mil]
  rect 61x11 smd paste+0 mask+0: 1(-227.5,147.64) 2(-227.5,127.95) 3(-227.5,108.27) 4(-227.5,88.58) 5(-227.5,68.9) 6(-227.5,49.21) 7(-227.5,29.53) 8(-227.5,9.84) 9(-227.5,-9.84) 10(-227.5,-29.53) 11(-227.5,-49.21) 12(-227.5,-68.9) 13(-227.5,-88.58) 14(-227.5,-108.27) 15(-227.5,-127.95) 16(-227.5,-147.64) 33(227.5,-147.64) 34(227.5,-127.95) 35(227.5,-108.27) 36(227.5,-88.58) 37(227.5,-68.9) 38(227.5,-49.21) 39(227.5,-29.53) 40(227.5,-9.84) 41(227.5,9.84) 42(227.5,29.53) 43(227.5,49.21) 44(227.5,68.9) 45(227.5,88.58) 46(227.5,108.27) 47(227.5,127.95) 48(227.5,147.64)
  rect 11x61 smd paste+0 mask+0: 17(-147.64,-227.5) 18(-127.95,-227.5) 19(-108.27,-227.5) 20(-88.58,-227.5) 21(-68.9,-227.5) 22(-49.21,-227.5) 23(-29.53,-227.5) 24(-9.84,-227.5) 25(9.84,-227.5) 26(29.53,-227.5) 27(49.21,-227.5) 28(68.9,-227.5) 29(88.58,-227.5) 30(108.27,-227.5) 31(127.95,-227.5) 32(147.64,-227.5) 49(147.64,227.5) 50(127.95,227.5) 51(108.27,227.5) 52(88.58,227.5) 53(68.9,227.5) 54(49.21,227.5) 55(29.53,227.5) 56(9.84,227.5) 57(-9.84,227.5) 58(-29.53,227.5) 59(-49.21,227.5) 60(-68.9,227.5) 61(-88.58,227.5) 62(-108.27,227.5) 63(-127.95,227.5) 64(-147.64,227.5)
  rect 238x238 smd paste-118.5 mask+0: EPAD(0,0)
  silkscreen extent -278,-278 278,278, body extent -236,-236 236,236, height 47
XTAL_ABM3B-8.000MHZ-10-1-U-T [mm]
  rect 1.2x1.8 smd: 1(-1.2,2) 2(-1.2,-2) 3(1.2,-2) 4(1.2,2)
  silkscreen extent -2.4,-2.5 1.6,2.5, body extent -1.59,-2.5 1.59,2.5, height 1.1

## Part data
BOOTA BOOTB BOOTC GND HGA HGB HGC HVGA HVGB HVGC LGA LGB LGC LVGA LVGB LVGC OUT1A OUT1B OUT1C SENSE1A SENSE1B SENSE1C TP10A TP10B TP10C TP11 TP13: library part CMP-024-000003-4, "Metal Foil, 0W, 0.05ohm, Surface Mount, 0805", Manufacturer Part Number 1=RCT-0C
C1 C2 C3 C4 C5: library part "CAP 100nF 50V", "Default Symbol for Capacitors", Manufacturer Part Number 1=CC0603KPX7R9BB104, Manufacturer Part Number 2=0805J0500104KJT, Rating=50V, Supplier Part Number 1=311-3567-1-ND, Temperature Coefficient=X7R, Tolerance=10%, Part Number="CAP 100nF 50V", Supplier 1=Digi-Key, Supplier 2=Digi-Key, Supplier Part Number 2=1608-1458-1-ND
C6: library part "CAP 2200pF 50V", "Default Symbol for Capacitors", Manufacturer Part Number 1=06035C222KAT2A, Manufacturer Part Number 2=CL21B222KBANNNC, Rating=50V, Supplier Part Number 1=478-1219-1-ND, Temperature Coefficient=X7R, Tolerance=10%, Part Number="CAP 2200pF 50V", Supplier 1=Digi-Key, Supplier 2=Digi-Key, Supplier Part Number 2=1276-1171-1-ND
C7 C8 C9: library part "CAP 50pF 50V", "50 pF ±5% 50V Ceramic Capacitor C0G, NP0 0603 (1608 Metric)", Operating Temperature="-55°C ~ 125°C", Package=0805, Rating=50V, Supplier Part Number 1=13-CC0603JRNPO9BN500CT-ND, Temperature Coefficient=X7R, Tolerance=10%, Supplier 1=Digikey
C10 C18: library part "CAP 22pF 50V", "Default Symbol for Capacitors", Rating=50V, Temperature Coefficient=X7R, Tolerance=10%, Part Number="CAP 22pF 50V"
C11: library part "CAP 10uF 16V", "CAP CER 10UF 16V X5R 0603/0805", Operating Temperature="-55°C ~ 85°C", Package=0603/0805, Rating=16V, Temperature Coefficient=X5R, Tolerance=10%, Part Number="CAP 10uF 16V"
C12: library part "CAP 0.10uF 16V", "CAP CER 0.10UF 16V X5R 0603", Operating Temperature="-55°C ~ 85°C", Package=0603/0805, Rating=16V, Temperature Coefficient=X5R, Tolerance=10%, Part Number="CAP 0.10uF 16V"
C13 C14: library part "CAP 10pF 50V", "Default Symbol for Capacitors", Rating=50V, Temperature Coefficient=X7R, Tolerance=10%, Part Number="CAP 10pF 50V"
C15: library part "CAP 330pF 50V", "Default Symbol for Capacitors", Rating=50V, Temperature Coefficient=X7R, Tolerance=10%, Part Number="CAP 330pF 50V"
C16: library part "CAP 220pF 16V", "Default Symbol for Capacitors", Rating=16V, Temperature Coefficient=X5R, Tolerance=10%, Part Number="CAP 220pF 16V"
C17 C21 C22: library part CMP-001-00129-1, Manufacturer Part Number 1=GRM21BR61H106KE43L, Manufacturer Part Number 2=CL32B106KBJNNWE, Rating=50V, Temperature Coefficient=X5R, Tolerance=10%, Part Number="CAP 10uF 50V"
C19: library part "CAP 1nF 50V", "CAP CER 0603 1NF 50V X7R 10%", Operating Temperature="-55°C ~ 125°C", Package=0805, Rating=50V, Supplier Part Number 1=80-C0603X102K5R3316, Temperature Coefficient=X7R, Tolerance=10%, Supplier 1=Mouser
C20: library part "CAP 0.047uF 16V", "Default Symbol for Capacitors", Rating=16V, Temperature Coefficient=X5R, Tolerance=10%, Part Number="CAP 0.047uF 16V"
C29 C30 C31 C32 C33 C34 C35 C37 C38 C39 C40 C41 C42 C43 C44: library part CMP-001-00612-1, "SMD capacitor X5R(EIA) with capacitance 10uF Tol.10%. Rated voltage 50Vdc 85C", Case/Package="2012 Murata", Check_prices=https://www.snapeda.com/parts/GRM21BR61H106KE43K/Murata/view-part/?ref=eda, Component Type=Standard, Design Item ID=GRM21BR61H106KE43K, MF=Murata, MP=GRM21BR61H106KE43K, Pins=2, SnapEDA_Link=https://www.snapeda.com/parts/GRM21BR61H106KE43K/Murata/view-part/?ref=snap, Source=GRM21BR61H106KE43K.SchLib
C45A C45B C45C C48A C48B C48C C50A C50B C50C C51A C51B C51C: library part CMP-001-00218-3, "Template for 0603 ceramic capacitor", Capacitor Type=Ceramic, Case/Package=0603, Mounting Technology=SM, Pins=2
C46A C46B C46C C47A C47B C47C C49A C49B C49C: library part CMP-001-00222-1, "Ceramic Capacitor, Multilayer, Ceramic, 50V, 10% +Tol, 10% -Tol, X7R, 15% TC, 0.22uF, Surface Mount, 0603", Capacitor Type=Ceramic, Case/Package=0603, Max Operating Temperature=125°C, Min Operating Temperature=-55°C, Mounting Technology="Surface Mount", Pins=2, RoHS Compliant=Yes
C_FB CLK CS GND MISO MOSI S_N S_P TP8 TP9 TP12: library part CMP-024-000001-1, Part Number="Test Point (Via)"
D1 D6: library part "LED GREEN SMD 0603", "Green 570nm LED Indication - Discrete 2V 0603 (1608 Metric)", Supplier Part Number 1=732-4980-1-ND, Supplier 1=Digikey
D2: library part "LED RED SMD 0603", "Red 625nm LED Indication - Discrete 2V 0603 (1608 Metric)", Supplier Part Number 1=732-4978-1-ND, Supplier 1=Digikey
D3: library part "LED BLUE SMD 0603", "Blue 470nm LED Indication - Discrete 3.2V 0603 (1608 Metric)", Supplier Part Number 1=732-4966-1-ND, Supplier 1=Digikey
D5: library part "DIODE SCHOTTKY 20V 1A", "Diode Schottky 20V 1A Surface Mount SOD-123FL", Current Rating=1A, Package=SOD-123, Voltage Rating=20V, ComponentLink1Description=digikey, ComponentLink1URL=https://www.digikey.ca/product-detail/en/on-semiconductor/MBR0540T1G/MBR0540T1GOSCT-ND/917967, Digikey=SM5817PL-TPMSCT-ND, Digikey Link=https://www.digikey.ca/product-detail/en/micro-commercial-co/SM5817PL-TP/SM5817PL-TPMSCT-ND/1793410, MF="Micro Commercial Co", MP=SM5817PL-TP, Part Number="DIODE SCHOTTKY 20V 1A", Pin Count=2, Supplier URL 1=https://www.digikey.ca/product-detail/en/on-semiconductor/MBR0540T1G/MBR0540T1GOSCT-ND/917967
D9A D9B D9C: library part CMP-004-00061-3, "PMEG4010EXE-Q - 40 V", Manufacturer_Name=Nexperia, Datasheet Link=https://assets.nexperia.com/documents/data-sheet/PMEG4010EXE.pdf, Design Item ID=PMEG4010EXEX, Height=1mm, Manufacturer_Part_Number=PMEG4010EXEX, Source=SamacSys.SchLib
J1: library part CMP-002-00648-2, "KK 396 Breakaway Header, Right-Angle, 8 Circuits, Tin (Sn) Plating, 7.0A per contact", Case/Package=None, Availability=Unavailable, Component Type=Standard, Design Item ID=26481082, MP=26481082, Pins=8, Price=None, Source=26481082.SchLib
J2: library part CMP-002-00627-3, "15 Position FFC Connector Contacts, Bottom 0.039 (1.00mm) Surface Mount, Right Angle", Case/Package=None, Availability=Warning, Check_prices=https://www.snapeda.com/parts/ZF1-15-01-T-WT-TR/Samtec/view-part/3472733/?ref=eda, Component Type=Standard, Design Item ID=ZF1-15-01-X-WT-XX, MF=Samtec, MP=ZF1-15-01-T-WT-TR, Pins=15, Price=None, Purchase-URL=https://pricing.snapeda.com/search/part/ZF1-15-01-T-WT-TR/?ref=eda, SnapEDA_Link=https://www.snapeda.com/parts/ZF1-15-01-T-WT-TR/Samtec/view-part/3472733/?ref=snap, Source=ZF1-15-01-X-WT-XX.SchLib
J3: library part CMP-002-00649-4, "CONN HEADER R/A 3POS 3MM", Case/Package=None, Availability=Unavailable, Component Type=Standard, Design Item ID=436500302, MP=436500302, Pins=3, Price=None, Source=436500302.SchLib
Q1A Q1B Q1C: "MOSFET 2N-CH 40V 45A 8TDSON", Manufacturer="Infineon Technologies", Manufacturer Order Number=IAUC45N04S6N070H, PackageReference=PG-TDSON-8-57
Q2: library part "MOSFET N-CH TN2130K1-G", "N-Channel 300 V 85mA (Tj) 360mW (Tc) Surface Mount TO-236AB (SOT23)", Mfr_Name=Microchip, Supplier Part Number 1=TN2130K1-GCT-ND, Copyright="Copyright (C) 2021 Ultra Librarian. All rights reserved.", Digi-Key_Part_Number_1=TN2130K1-GCT-ND, Digi-Key_Part_Number_2=TN2130K1-GDKR-ND, Digi-Key_Part_Number_3=TN2130K1-GTR-ND, Manufacturer Part Number 1=TN2130K1-G, Manufacturer_Part_Number=TN2130K1-G, Part Number="MOSFET N-CH TN2130K1-G", RefDes=RefDes, Supplier 1=Digi-Key, Supplier URL 1=https://www.digikey.com/en/products/detail/microchip-technology/TN2130K1-G/4902939, Type=DEV
R1 R2 R3: library part CMP-009-00203-1, Manufacturer Part Number 1=ERJ-H3GJ103V, Manufacturer Part Number 2=RMCF0805JT10K0, Tolerance=5%, Part Number="RES 10k 1/8W - 1%", Supplier URL 1=https://www.digikey.ca/en/products/detail/panasonic-electronic-components/ERJ-H3GJ103V/13877876?s=N4IgTCBcDaIIwAYC0BRASgKSQCQMwHENFcA1AYQBUkA5AERAF0BfIA, Supplier URL 2=https://www.digikey.ca/en/products/detail/stackpole-electronics-inc/RMCF0805JT10K0/1757762?s=N4IgTCBcDaIEoFkDCAxADADjQVgFIBUBGNAaTSXxAF0BfIA, Tolerance 2=5%
R4 R5 R6: library part "RES 1.8k 1/8W", "Default Resistor Symbol", Package=0805, Power (Watts)=0.125W, Tolerance=5%, Part Number="RES 1.8k 1/8W"
R7 R12: library part "RES 5.83k 1/10W 0.1%", "RES 5.83K OHM 0.1% 1/10W 0603", Package=0603, Power (Watts)=0.125W, Supplier Part Number 1=2019-RN73H1JTTD5831B25CT-ND, Tolerance=1%, Supplier 1=Digikey
R8: library part CMP-009-00271-1, Part Number="RES 27k 1/8W"
R11 R32: library part "RES 110.0 1/8W - 1%", "Default Resistor Symbol", Manufacturer Part Number 1=RMCF0603FT110R, Package=0805, Power (Watts)=0.125W, Supplier Part Number 1=RMCF0603FT110RCT-ND, Tolerance=1%, Part Number="RES 110.0 1/8W - 1%", Supplier 1=Digi-Key, Supplier URL 1=https://www.digikey.ca/en/products/detail/stackpole-electronics-inc/RMCF0603FT110R/1761268
R13: library part "RES 845 1/10W 1%", "RES 845 OHM 1% 1/10W 0603", Package=0603, Power (Watts)=0.125W, Supplier Part Number 1=7098270, Tolerance=1%, Supplier 1="Future Electronics"
R14: library part "RES 100R 1/10W 0.05%", "0 OHM 1/10W 0603", Package=0603, Power (Watts)=0.125W, Supplier Part Number 1=RG16N100WCT-ND, Tolerance=1%, Supplier 1=Digikey
R15 R19: library part "RES 100R 1/10W 0.05%", "RES SMD 1.5k OHM 0.05% 1/10W 0603", Package=0603, Power (Watts)=0.125W, Supplier Part Number 1=RG16N100WCT-ND, Tolerance=1%, Supplier 1=Digikey
R16: library part "RES 1.87K 1/10W 1%", "RES 1.87K OHM 1% 1/10W 0603", Package=0603, Power (Watts)=0.125W, Supplier Part Number 1=2610988, Tolerance=1%, Supplier 1="Future Electronics"
R17: library part "RES 100R 1/10W 0.05%", "RES SMD 100 OHM 0.05% 1/10W 0603", Package=0603, Power (Watts)=0.125W, Supplier Part Number 1=RG16N100WCT-ND, Tolerance=1%, Supplier 1=Digikey
R18: library part "RES 100R 1/10W 0.05%", "0 OHM  1/10W 0603", Package=0603, Power (Watts)=0.125W, Supplier Part Number 1=RG16N100WCT-ND, Tolerance=1%, Supplier 1=Digikey
R20 R27: library part CMP-009-00004-5, "Chip Resistor, 0 Ohm, 0.063 W, -55 to 155 degC, 0402 (1005 Metric)", Case/Package=0402, Max Operating Temperature=155°C, Min Operating Temperature=-55°C, Power=63mW, Voltage Rating=50V, Mounting Technology=SM, Pins=2, RoHS Compliant=True
R21: "1W 0.015 OHM METAL ALLOY CS 1% C 1206", Supplier Part Number 1=273-MCS1632R015DERCT-ND, ComponentLink1Description="New link", ComponentLink1URL=https://www.digikey.ca/en/products/detail/ohmite/MCS1632R015DER/22672431, Supplier 1=Digikey
R22: library part "RES 5.83k 1/10W 0.1%", "RES 3K OHM 0.1% 1/10W 0603", Package=0603, Power (Watts)=0.125W, Supplier Part Number 1=2019-RN73H1JTTD5831B25CT-ND, Tolerance=1%, Supplier 1=Digikey
R23: library part "RES 17.2k 1/10W 0.1%", "RES 17.2k OHM 0.1% 1/10W 0603", Package=0603, Power (Watts)=0.125W, Supplier Part Number 1=2019-RN73H1JTTD1722B25CT-ND, Tolerance=1%, Supplier 1=Digikey
R24: library part "RES 2k 1/8W", "Default Resistor Symbol", Package=0805, Power (Watts)=0.125W, Tolerance=5%, Part Number="RES 2k 1/8W"
R25: library part "RES 47k 1/8W - 1%", "Default Resistor Symbol", Manufacturer Part Number 1=MCT06030C4702FP500, Package=0805, Power (Watts)=0.125W, Supplier Part Number 1=MCT0603-47.0K-CFCT-ND, Tolerance=1%, Part Number="RES 47k 1/8W - 1%", Supplier 1=Digi-Key, Supplier URL 1=https://www.digikey.ca/en/products/detail/vishay-beyschlag-draloric-bc-components/MCT06030C4702FP500/2607854?s=N4IgTCBcDaILIGEAqAGAbCgzAWgCwHYA6FAaWwQDFlsA5AERAF0BfIA
R26A R26B R26C R30A R30B R30C R34A R34B R34C: library part CMP-009-00398-1, "SMD Chip Resistor, 10 Ohm, ± 1%, 250 mW, 0603 [1608 Metric], Thick Film, Anti-Surge", Case/Package=0603, Power=250mW, Pins=2
R28A R28B R28C R35A R35B R35C: library part CMP-009-00391-3, "Template for 0603 Resistor", Case/Package=0603, Pins=2
R33A R33B R33C R36A R36B R36C: library part CMP-009-00395-2, "Fixed Resistor, Metal Glaze/thick Film, 0.1W, 100000ohm, 75V, 1% +/-Tol, 100ppm/Cel, Surface Mount, 0603", Case/Package=0603, Max Operating Temperature=155°C, Min Operating Temperature=-55°C, Power=100mW, Tolerance=1%, Mounting Technology="Surface Mount", Pins=2, RoHS Compliant=Yes
R37: library part CMP-009-00399-1, "Fixed Resistor, Metal Glaze/thick Film, 0.1W, 0ohm, Surface Mount, 0603", Case/Package=0603, Max Operating Temperature=155°C, Min Operating Temperature=-55°C, Power=100mW, Mounting Technology="Surface Mount", Pins=2, RoHS Compliant=Yes
R38: library part "RES 10k 1/8W - 1%", "Default Resistor Symbol", Manufacturer Part Number 1=ERJ-H3GJ103V, Manufacturer Part Number 2=RMCF0805JT10K0, Package=0805, Power (Watts)=0.125W, Supplier Part Number 1=10-ERJ-H3GJ103VCT-ND, Tolerance=5%, Part Number="RES 10k 1/8W - 1%", Supplier 1=Digi-Key, Supplier 2=Digi-Key, Supplier Part Number 2=RMCF0805JT10K0CT-ND, Supplier URL 1=https://www.digikey.ca/en/products/detail/panasonic-electronic-components/ERJ-H3GJ103V/13877876?s=N4IgTCBcDaIIwAYC0BRASgKSQCQMwHENFcA1AYQBUkA5AERAF0BfIA, Supplier URL 2=https://www.digikey.ca/en/products/detail/stackpole-electronics-inc/RMCF0805JT10K0/1757762?s=N4IgTCBcDaIEoFkDCAxADADjQVgFIBUBGNAaTSXxAF0BfIA, Tolerance 2=5%
R39 R40: library part "RES 470k 1/8W", "Default Resistor Symbol", Package=0805, Power (Watts)=0.125W, Tolerance=5%, Part Number="RES 470k 1/8W"
R41: library part "RES 68k 1/8W", "Default Resistor Symbol", Package=0805, Power (Watts)=0.125W, Tolerance=5%, Part Number="RES 68k 1/8W"
U1: "No Description Available", Mfr_Name=STMicroelectronics, RefDes=RefDes, Type=Type
U2: "IC OPAMP VFB 1 CIRCUIT SOT23-5", Manufacturer="Analog Devices", Manufacturer Part Number=ADA4505-1ARJZ-R7, Max Operating Temperature=125°C, Supplier Part Number 1=595-OPA356AIDBVR, Category="Amplifiers - Op Amps, Buffer, Instrumentation", ComponentLink1Description=https://datasheet.ciiva.com/22712/1610797-22712032.pdf?src-supplier=Element14, ComponentLink1URL=https://datasheet.ciiva.com/22712/1610797-22712032.pdf?src-supplier=Element14, ComponentLink2Description=https://datasheet.ciiva.com/23805/608874-23805844.pdf?src-supplier=Newark, ComponentLink2URL=https://datasheet.ciiva.com/23805/608874-23805844.pdf?src-supplier=Newark, ComponentLink3Description=https://datasheet.ciiva.com/1487/1610797-1487372.pdf?src-supplier=Element14, ComponentLink3URL=https://datasheet.ciiva.com/1487/1610797-1487372.pdf?src-supplier=Element14, Digikey=ADA4505-1ARJZ-R7CT-ND, Number of Pins=5, REACH SVHC="No SVHC", RoHS=Yes, Supplier 1=Mouser
Y1: "8 MHz Â±10ppm Crystal 10pF 200 Ohms 4-SMD, No Lead", Package="SMD-4 Abracon LLC", Availability="In Stock", Check_prices=https://www.snapeda.com/parts/ABM3B-8.000MHZ-10-1-U-T/Abracon+LLC/view-part/?ref=eda, MF=Abracon, MP=ABM3B-8.000MHZ-10-1-U-T, Price=None, Purchase-URL=https://pricing.snapeda.com/search/part/ABM3B-8.000MHZ-10-1-U-T/?ref=eda, SnapEDA_Link=https://www.snapeda.com/parts/ABM3B-8.000MHZ-10-1-U-T/Abracon+LLC/view-part/?ref=snap

## Free pads (board coordinates)
  round 3 hole 2.2: 9(5,25) 9(38,25)

## Via types
v1: diameter 0.559, hole 0.305, TOP to BOT, tented both sides, 347 vias